# Altium PCB PCB1.PcbDoc (part 1 of 2)
Units mm, origin at the board's own origin, x right, y up, seen from the top; angles counter-clockwise.
Board outline 152.5 x 85 mm, 4 copper layers (Top Layer, GND, PWR/GND, Bottom Layer), stack 1.598 mm thick; 151 components, 100 nets, 477 pads, 653 vias.
Unrouted connection lines stored in the file: 110.
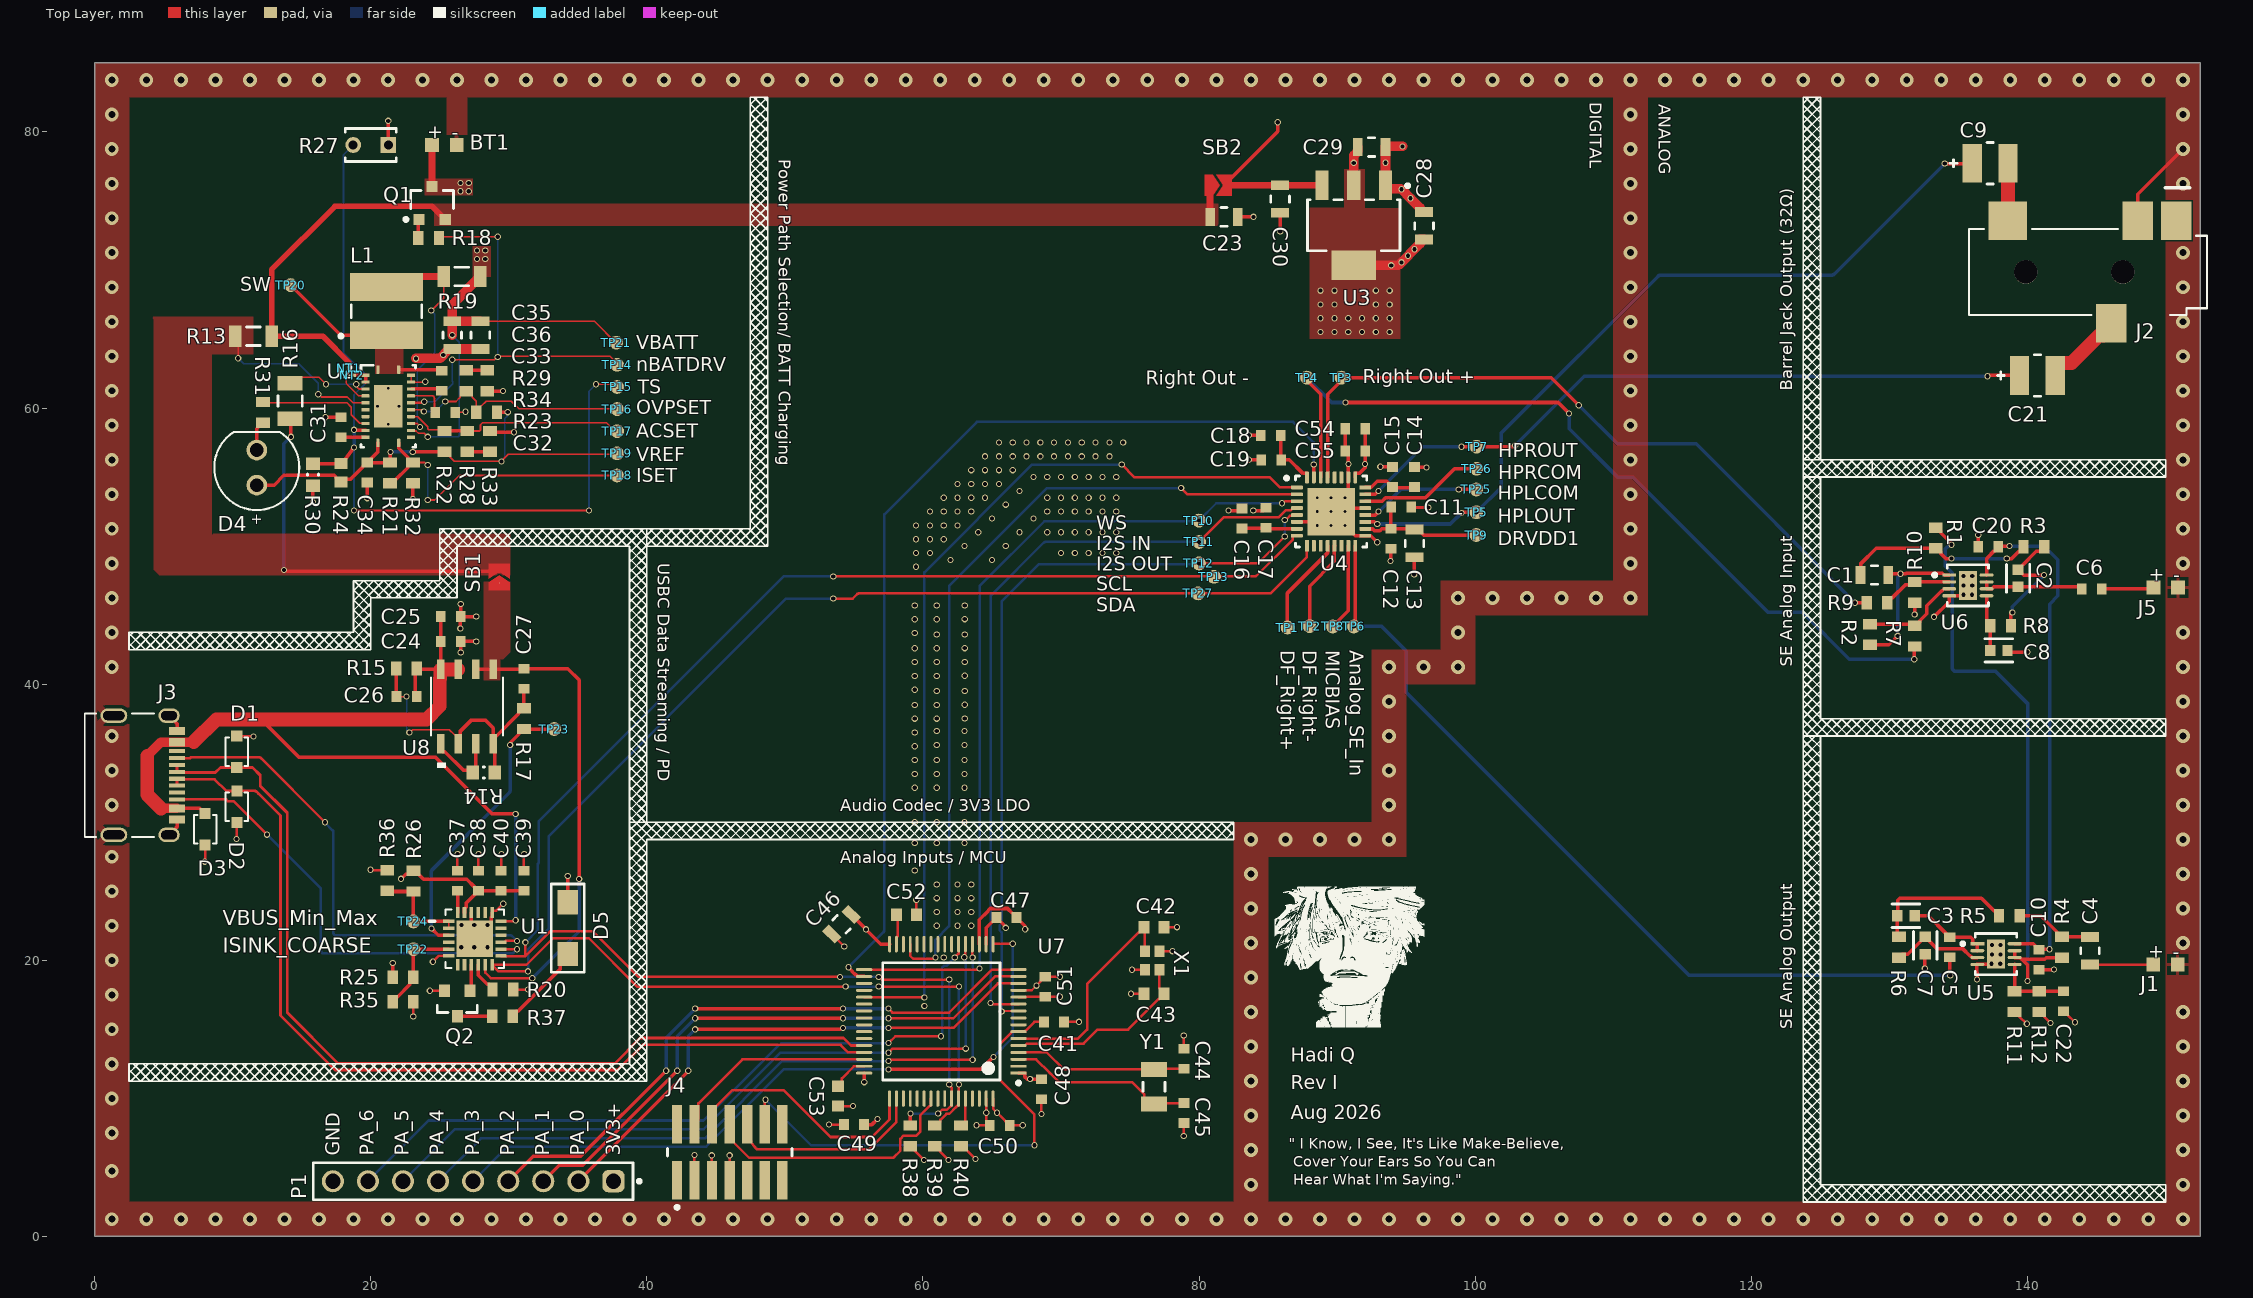
[diagram p0: Top Layer view]
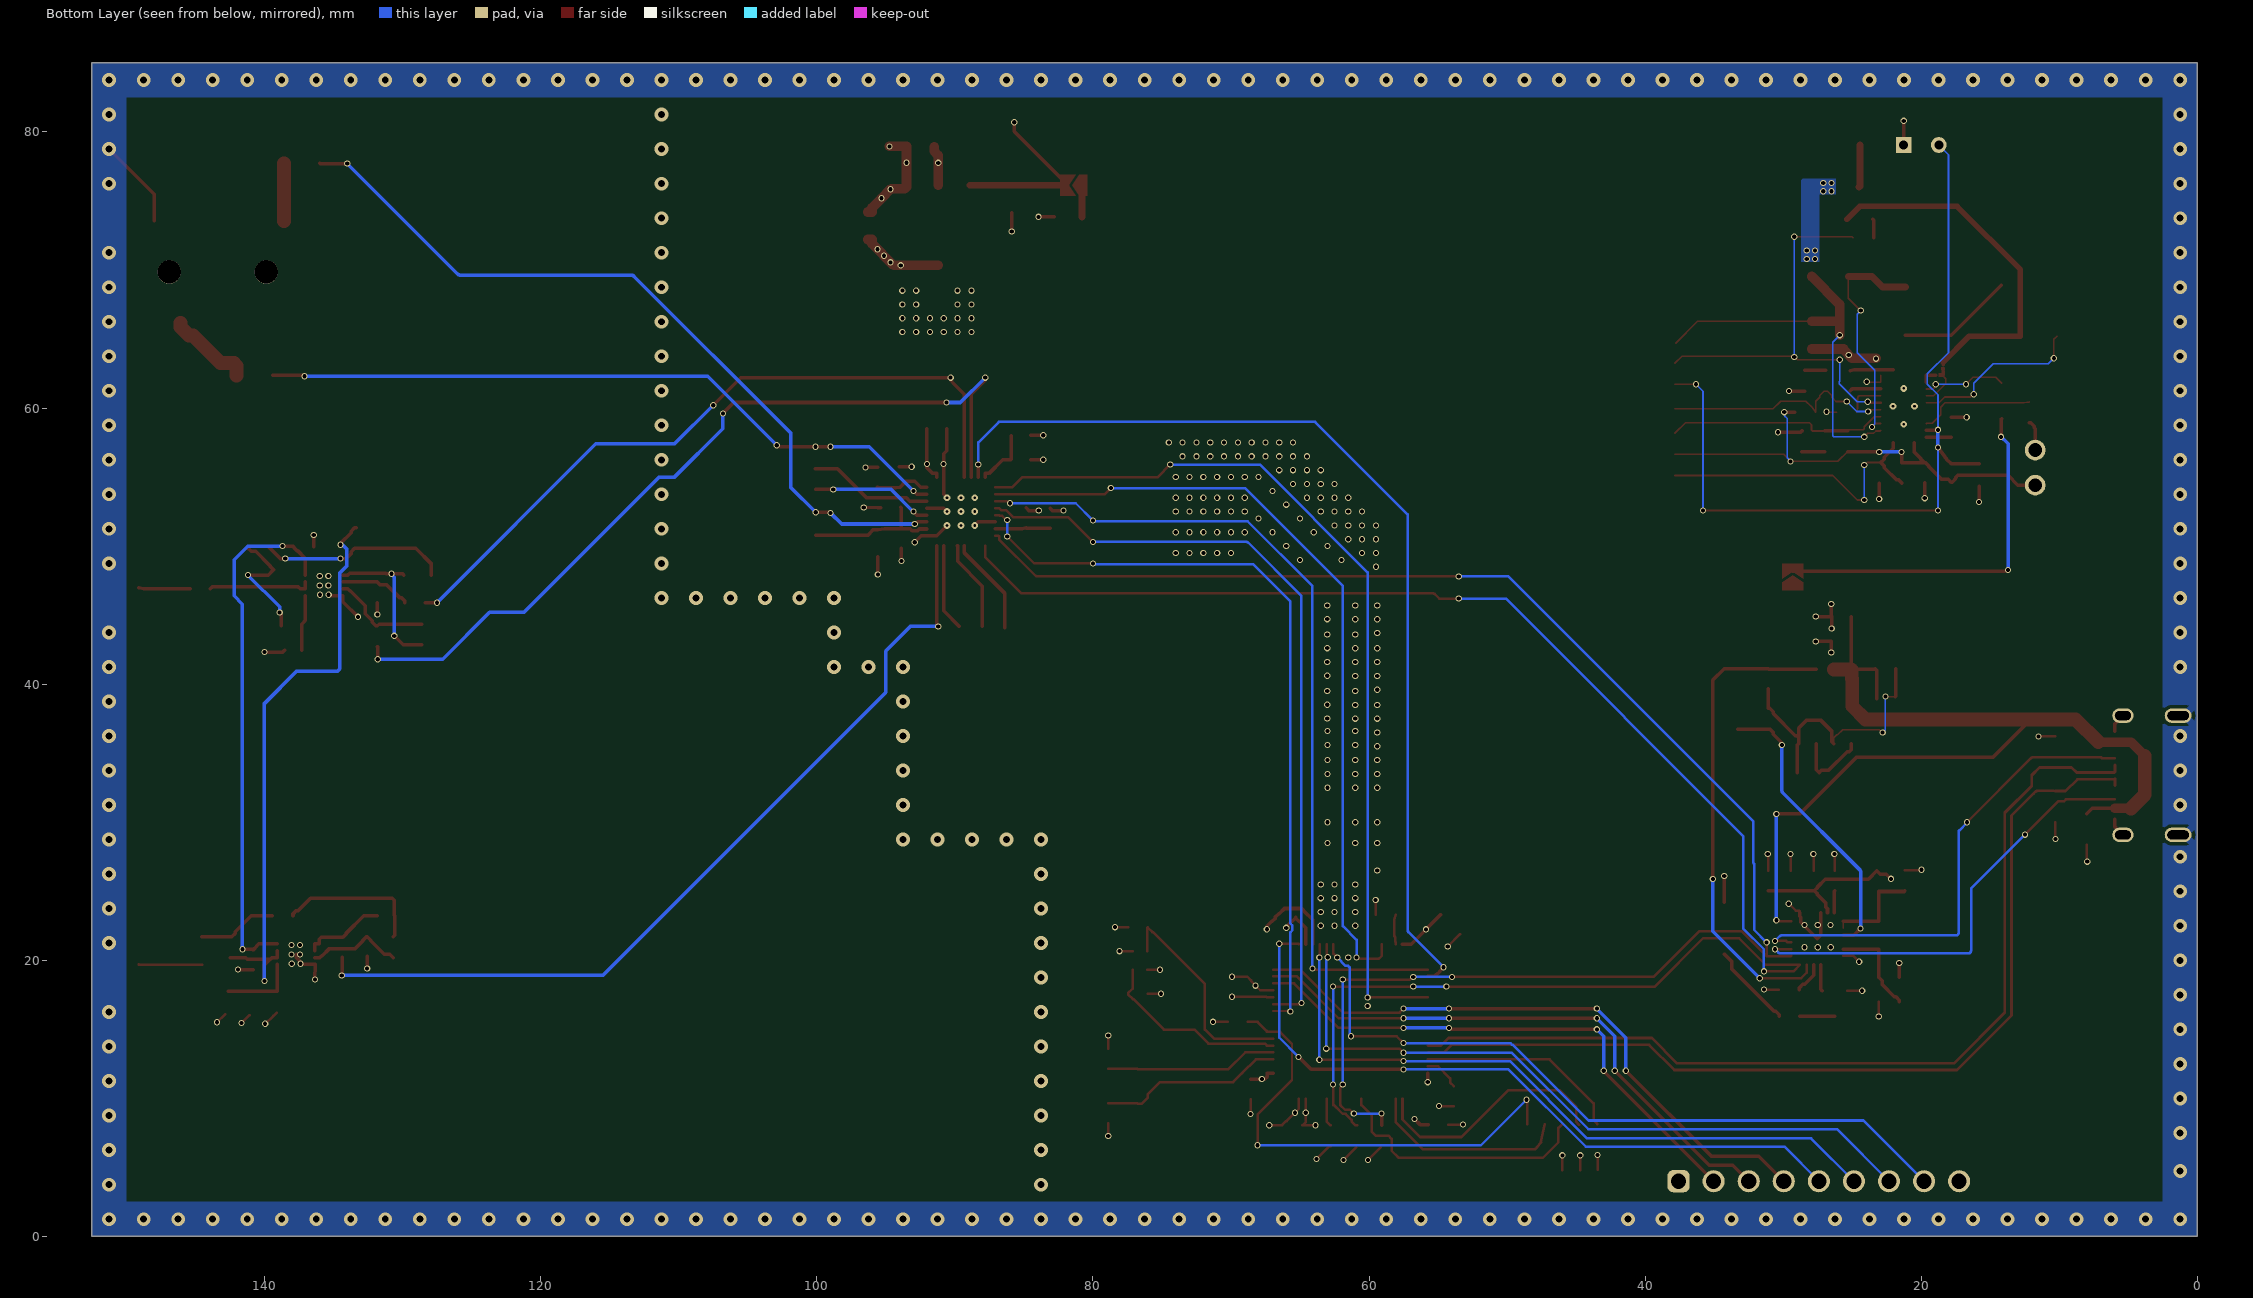
[diagram p1: Bottom Layer view, seen from below]
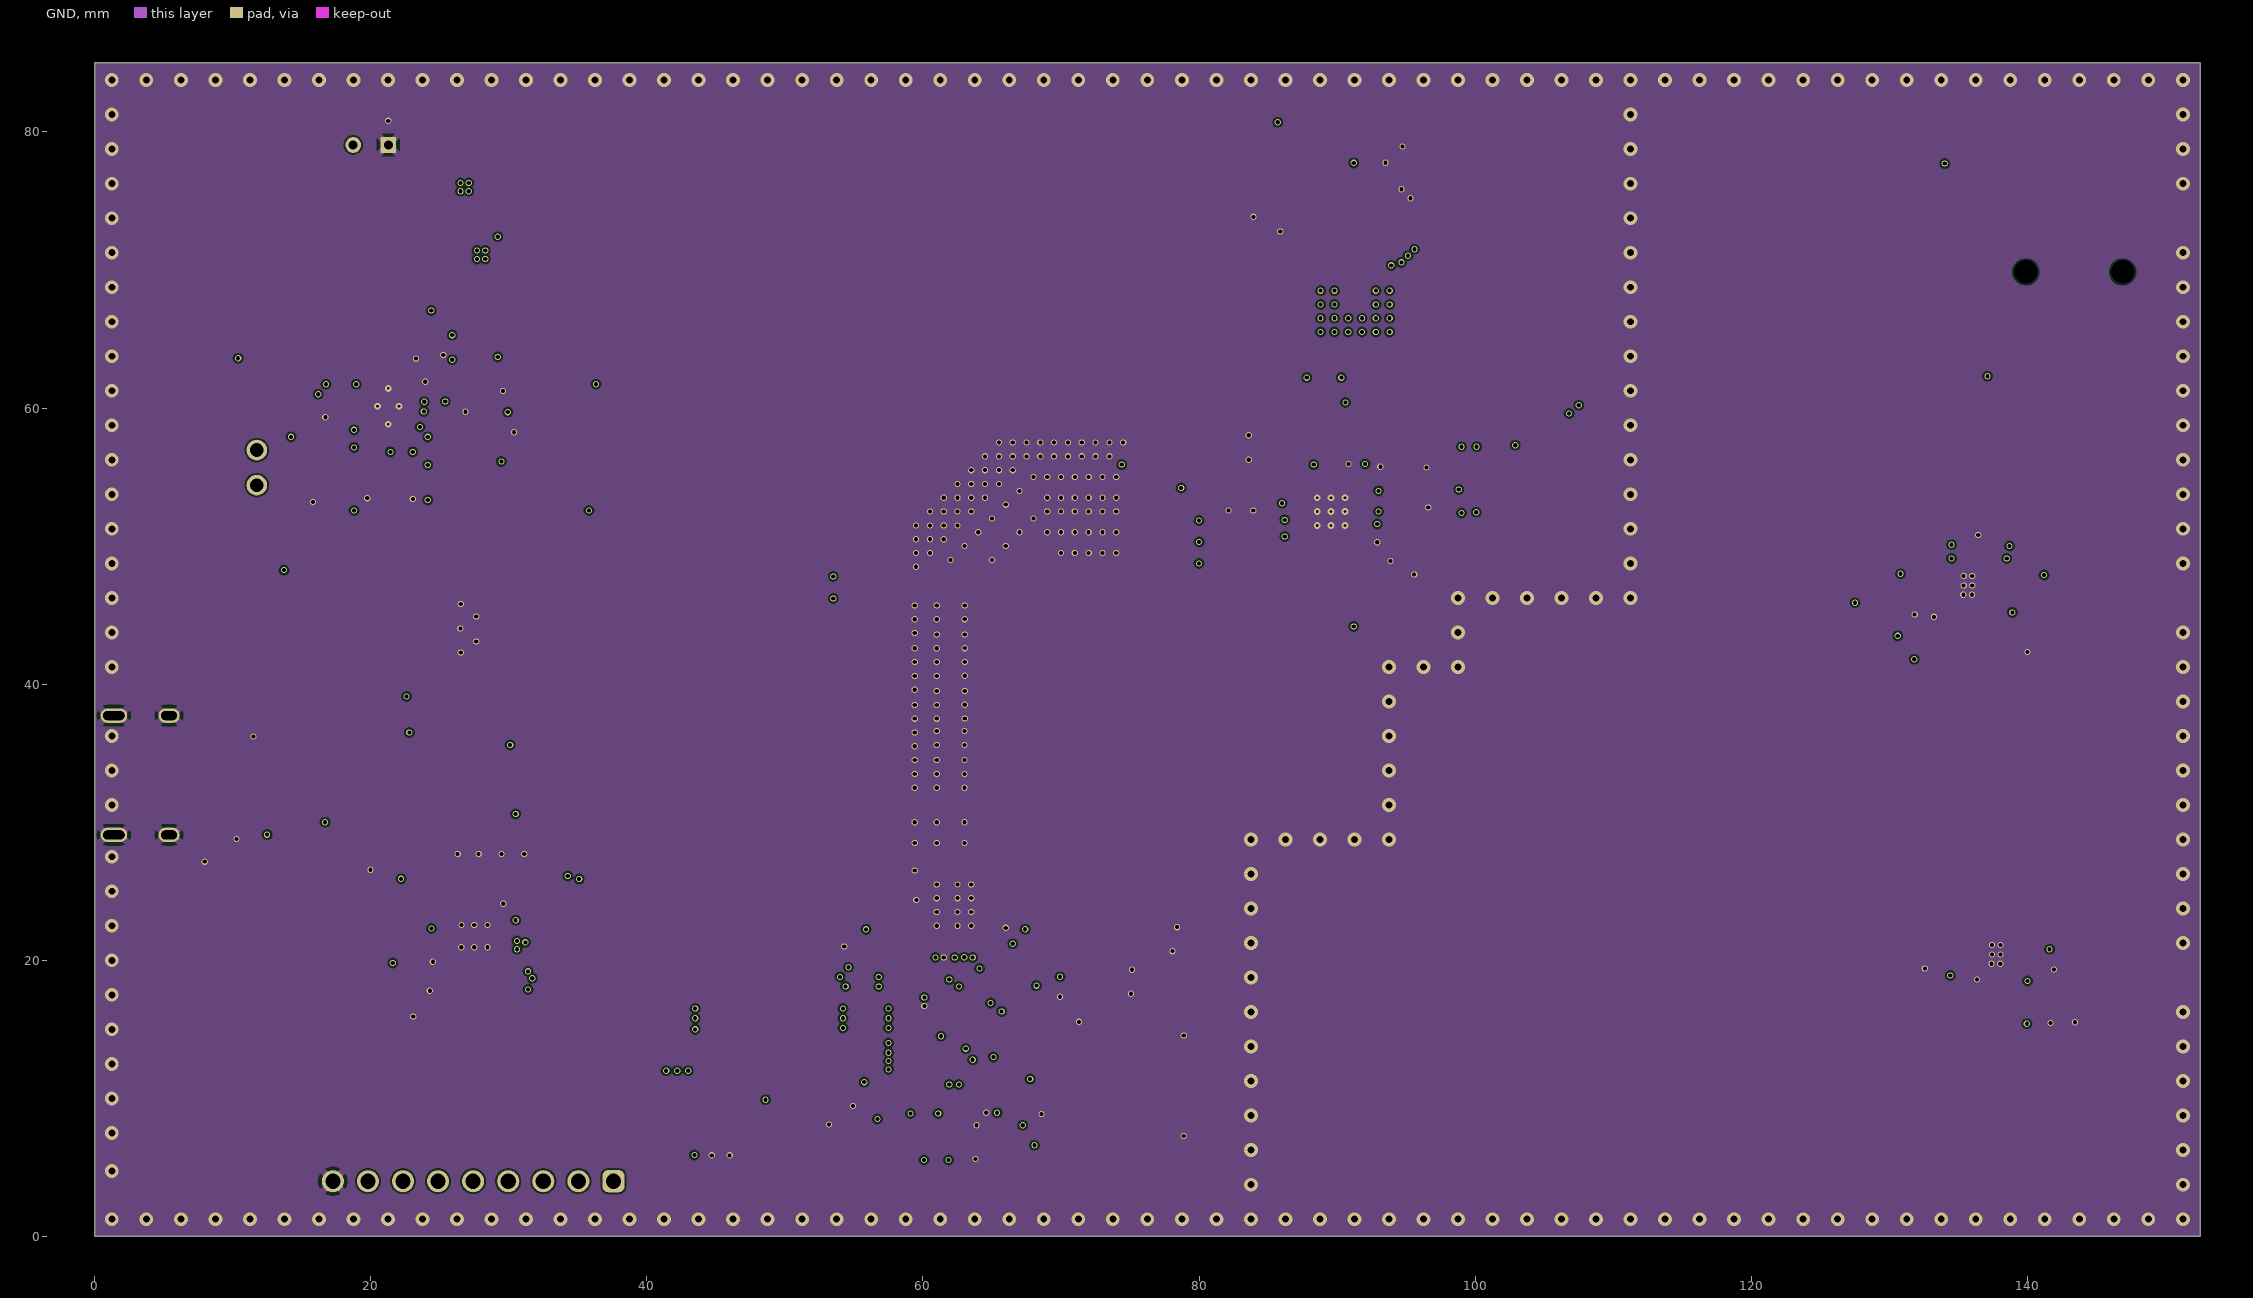
[diagram p2: GND]
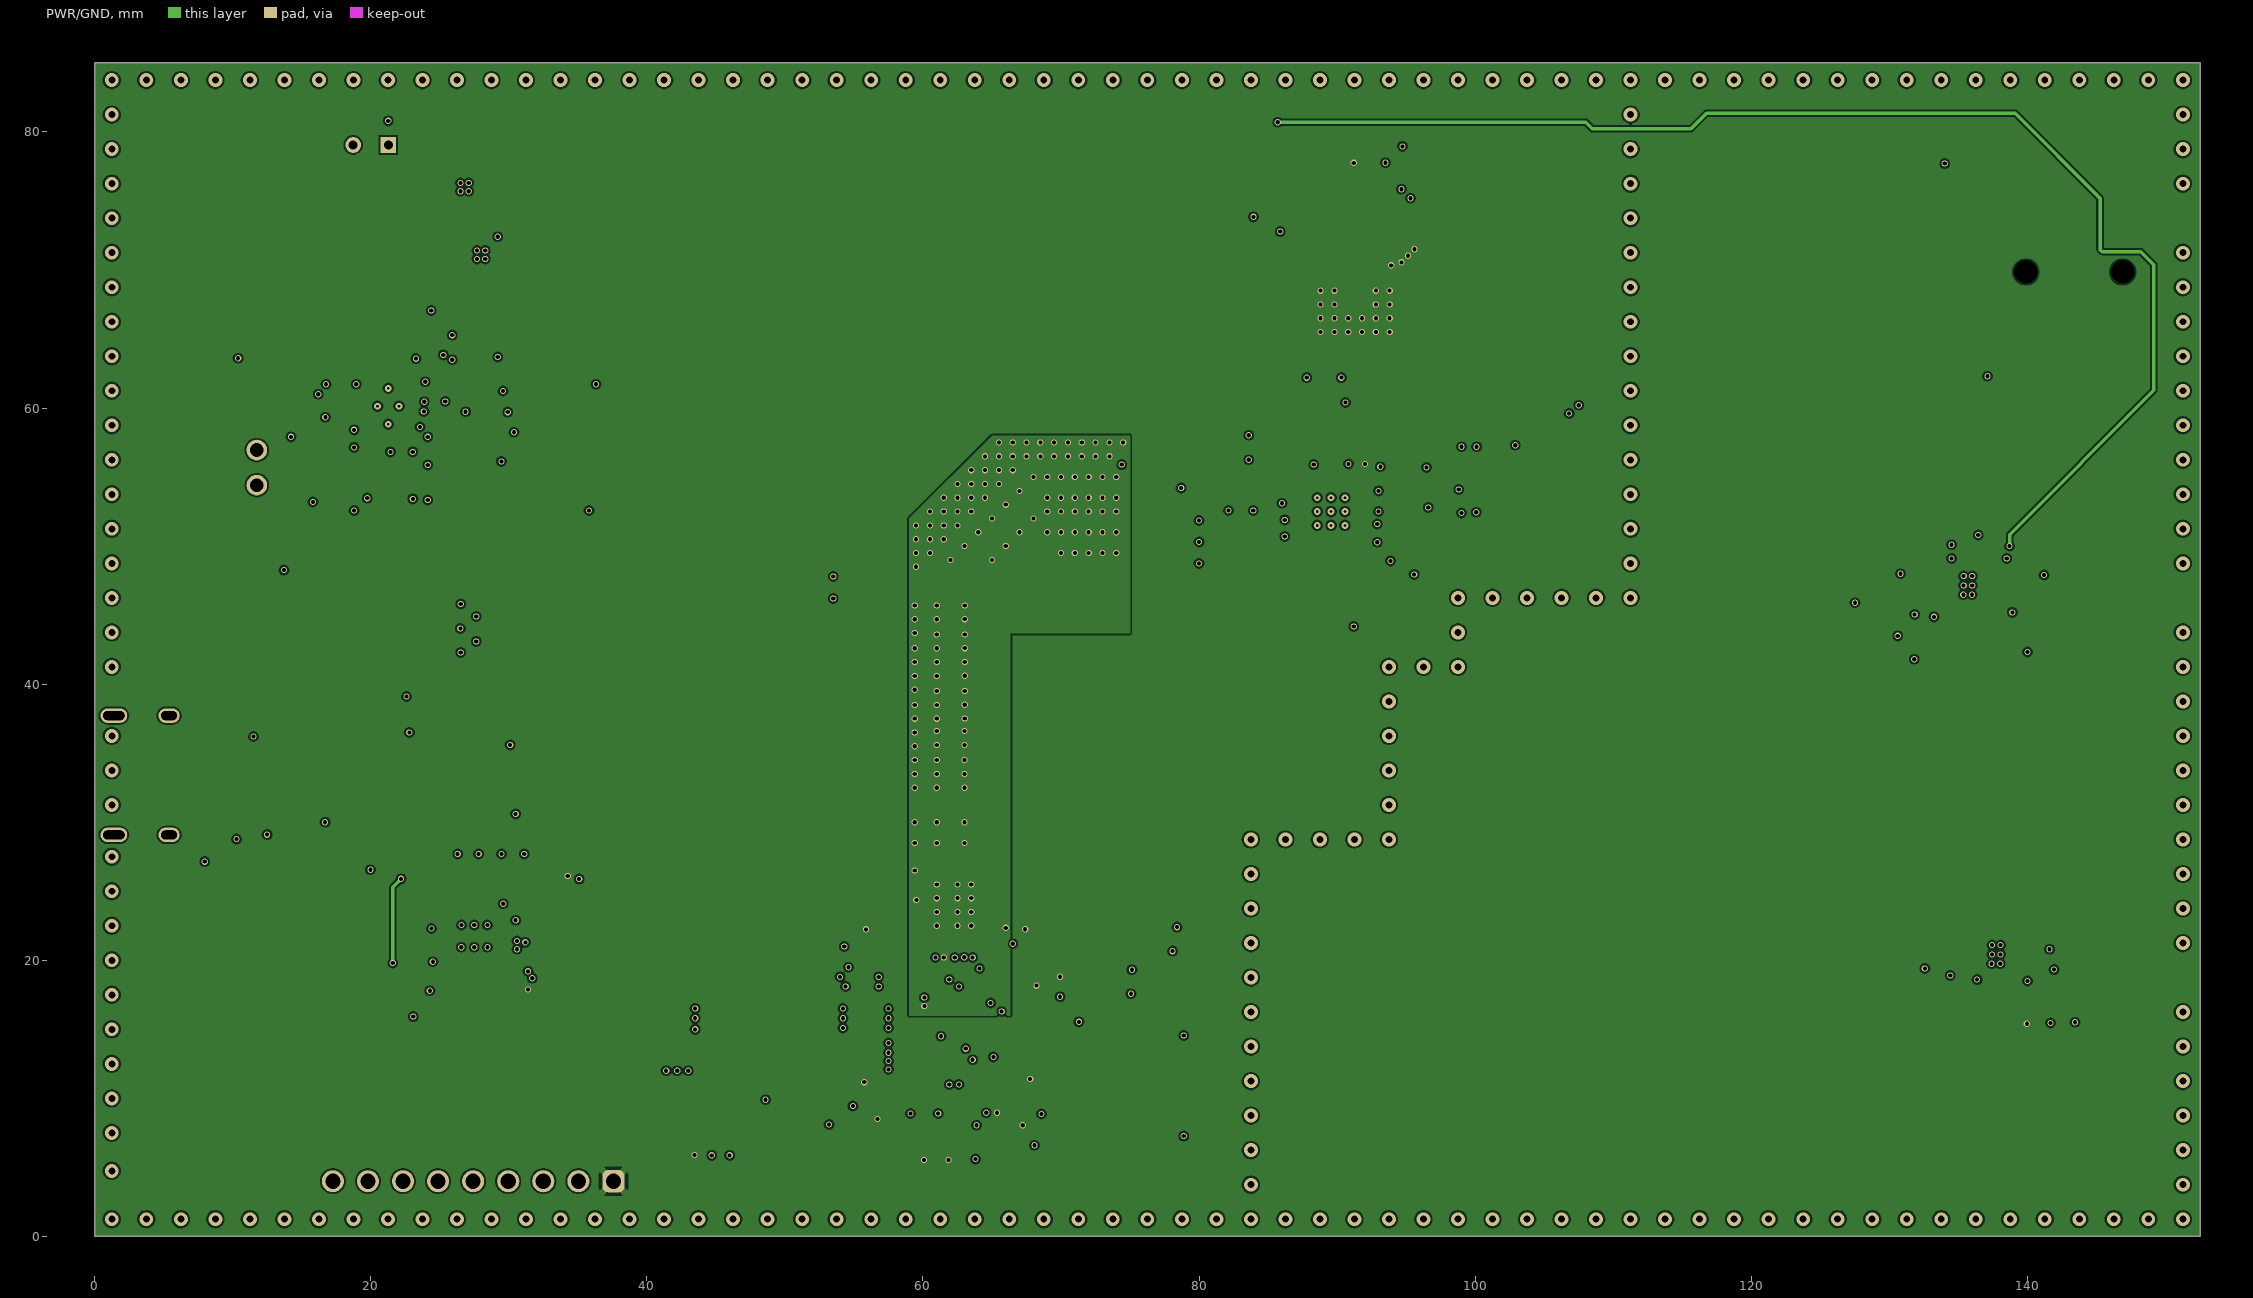
[diagram p3: PWR/GND]
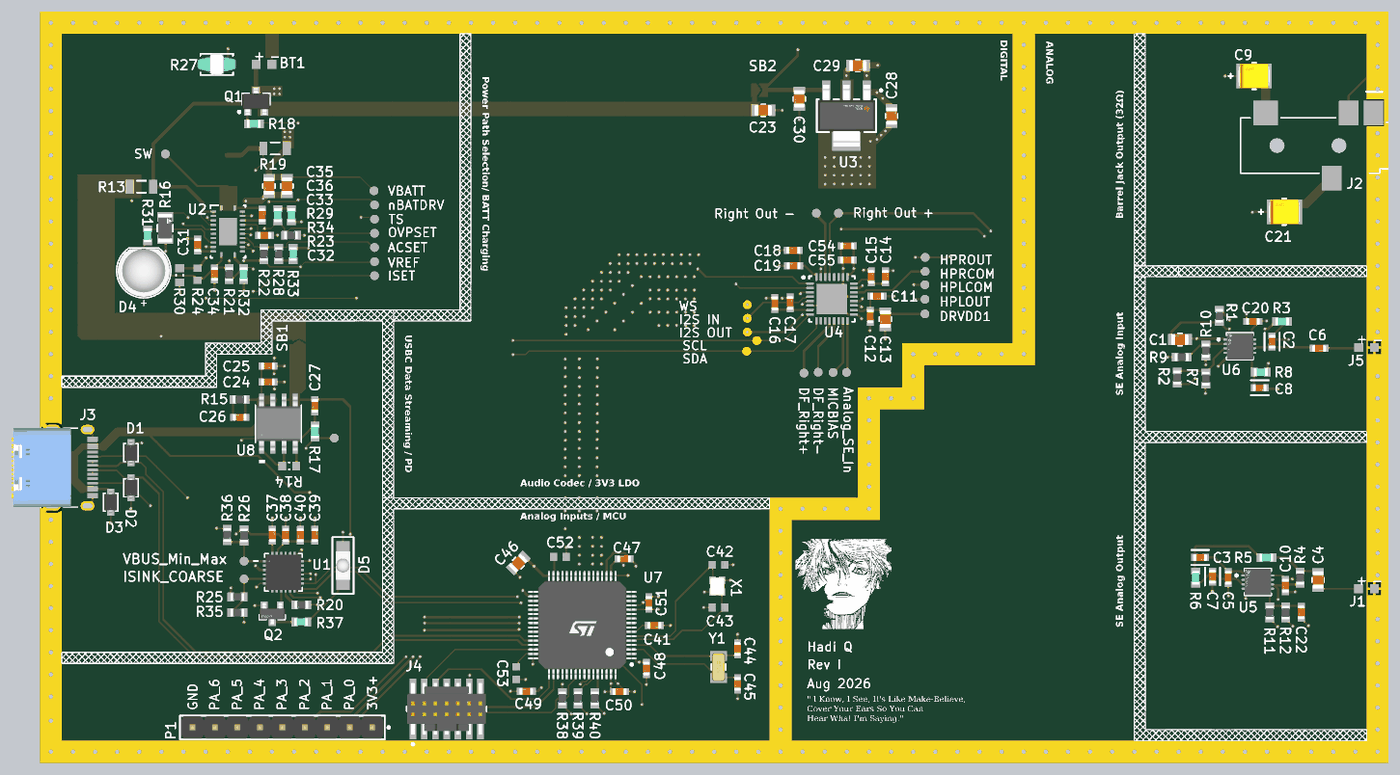
[diagram p5: 3D render of the assembled board from above, using the file's embedded part models]

## Layer stack, top to bottom
Top Solder: solder mask 0.0254, SM-002, Dk 4
Top Layer: signal copper 0.0351
Dielectric 2: prepreg 0.1163, PP-006, Dk 4.1
GND: signal copper 0.0152
Dielectric 1: dielectric 1.2649, FR-4, Dk 4.8
PWR/GND: signal copper 0.0152
Dielectric 3: prepreg 0.1163, PP-006, Dk 4.1
Bottom Layer: signal copper 0.0351
Bottom Solder: solder mask 0.0254, SM-002, Dk 4

## Board outline
0,0 0,85 152.5,85 152.5,0

## Design rules (kind name [scope] priority, off if disabled: settings)
Clearance [All] p1: gap=0.125 ignorepadtopadclearanceinfootprint=TRUE except(0.15: SMDPad-SMDPad SMDPad-THPad SMDPad-Via Via-Fill Via-Poly Via-Region)
DiffPairsRouting [All] p1: maxlimit=1 minlimit=0.127 mostfreqgap=0.292 toplayer_mingap=0.292 toplayer_minwidth=0.2 toplayer_maxwidth=0.2 toplayer_prefwidth=0.2 midlayer1_maxgap=0.127 midlayer1_prefgap=0.127 midlayer1_minwidth=0.117 midlayer1_maxwidth=0.117 midlayer1_prefwidth=0.117 midlayer2_maxgap=0.127 midlayer2_prefgap=0.127 midlayer2_minwidth=0.117 midlayer2_maxwidth=0.117 midlayer2_prefwidth=0.117 bottomlayer_mingap=0.292 bottomlayer_maxgap=0.292 bottomlayer_minwidth=0.2 bottomlayer_maxwidth=0.2 bottomlayer_prefwidth=0.2 impedanceprofiledriven=TRUE impedanceprofileid={DCE49A70-BC4B-4412-AF37-7F07E3D19BCE} impedanceprofilevalue=90.000000 maxuncoupledlength=12.7
Height [All] p1: minheight=0 maxheight=50 prefheight=12.7
HoleSize [All] p1: absolutevalues=TRUE maxlimit=6.3 minlimit=0.15 maxpercent=80.000 minpercent=20.000
HoleToHoleClearance [All] p1: gap=0.22 allowstackedmicrovias=TRUE
MaxMinImpedance [All] p1: minimum=1.000 maximum=10.00
MinimumAnnularRing [All] p1: minimumring=0.07
MinimumSolderMaskSliver [All] p1: minsoldermaskwidth=0.01
PasteMaskExpansion [(InComponent('U7') OR InComponent('U8') OR InComponent('U6') OR InComponent('U5') OR InComponent('U2')  OR InComponent('U4')OR InComponent('U1'))] p1: expansion=0 percent=-30.000000
PasteMaskExpansion PasteMaskExpansion_1 [All] p2: expansion=0 percent=0.000000
PolygonConnect [All] p1: thpad.connectstyle=Relief thpad.reliefconductorwidth=0.508 thpad.reliefentries=4 thpad.polygonreliefangle="45 Angle" thpad.airgapwidth=0.254 smdpad.connectstyle=Direct smdpad.reliefconductorwidth=0.508 smdpad.reliefentries=4 smdpad.polygonreliefangle="45 Angle" smdpad.airgapwidth=0.254 via.connectstyle=Direct via.reliefconductorwidth=0.508 via.reliefentries=4 via.polygonreliefangle="45 Angle" via.airgapwidth=0.254
RoutingVias [All] p1: holewidth=0.3 width=0.45 viastyle="Through Hole" minholewidth=0.3 minwidth=0.4 maxholewidth=0.711 maxwidth=1.27
SilkToSolderMaskClearance [IsPad] p1: minsilkscreentomaskgap=0.01 clearancetoexposedcopper=TRUE
SolderMaskExpansion [All] p1: expansion=0.025 istentingtop=FALSE
SupplyNets "Schematic Supply Nets_2" [InNet('VDDD')] p1: voltage=0.000
SupplyNets "Schematic Supply Nets_8" [InNet('V_Bias')] p2: voltage=0.000
SupplyNets "Schematic Supply Nets_6" [InNet('VCC')] p3: voltage=0.000
SupplyNets "Schematic Supply Nets_5" [InNet('3V3+')] p4: voltage=0.000
SupplyNets "Schematic Supply Nets" [InNet('VREF')] p5: voltage=0.000
SupplyNets "Schematic Supply Nets_1" [InNet('GND')] p6: voltage=0.000
ViasUnderSMD [All] p1: allowed=FALSE
Width Width_50_ohm [InNetClass('50Ω')] p1: maxlimit=0.254 minlimit=0.187 preferedwidth=0.254 toplayer_maxwidth=0.187 toplayer_prefwidth=0.187 bottomlayer_maxwidth=0.187 bottomlayer_prefwidth=0.187 impedanceprofiledriven=TRUE impedanceprofileid={CBE12A36-6EF9-4A58-95A5-F5C6A3B3EB3F} impedanceprofilevalue=50.000000 minimp=50.000000 maximp=50.000000 favimp=50.000000
Width [All] p2: maxlimit=2.5 minlimit=0.12 preferedwidth=0.254
23 further rules are at their usual default settings.

## Classes and differential pairs
net class 50Ω: MCU_I2S_MCLK
differential pair D: +D_P -D_N

## Components (designator, comment, footprint, x,y, rotation, side; value= is the part's Value field where it differs from the comment)
BT1 "2S_BATT" 2_soldering_pads 24.45,79.051 r0 top locked
C1 "GCM21BC71E106KE36L" MURATA-G_M21B 128.905,47.903 r180 top value=10µF
C2 "1nF" FP-GRM188-0_1-e0_2_0_5-IPC_C 139.319,47.665 r270 top
C3 "1nF" FP-GRM188-0_1-e0_2_0_5-IPC_C 131.191,23.232 r0 top
C4 "GCM21BC71E106KE36L" MURATA-G_M21B 144.526,20.692 r90 top value=10µF
C5 "GCM188R71H104KA57D" MURATA-G_M188 134.366,20.946 r270 top value=100nF
C6 "GCM188R71H104KA57D" MURATA-G_M188 144.653,46.903 r0 top value=100nF
C7 "1nF" FP-GRM188-0_1-e0_2_0_5-IPC_C 132.588,21.077 r270 top
C8 "1nF" FP-GRM188-0_1-e0_2_0_5-IPC_C 137.922,42.446 r0 top
C9 "TAJB107M006RNJ" FP-TAJB-MFG 137.287,77.726 r180 top
C10 "GCM188R71H104KA57D" MURATA-G_M188 140.825,20.05 r270 top value=100nF
C11 "GCM188R71H104KA57D" MURATA-G_M188 94.651,52.816 r0 top value=100nF
C12 "GCM188R71E105KA64D" MURATA-G_M188 93.889,50.53 r270 top value=1µF
C13 "GCM21BC71E106KE36L" MURATA-G_M21B 95.6,50.2 r270 top value=10µF
C14 "GCM188R71E105KA64D" MURATA-G_M188 95.6,55 r90 top value=1µF
C15 "GCM188R71H104KA57D" MURATA-G_M188 94,55 r90 top value=100nF
C16 "GCM188R71E105KA64D" MURATA-G_M188 83.1,52 r90 top value=1µF
C17 "GCM188R71H104KA57D" MURATA-G_M188 84.836,52.045 r90 top value=100nF
C18 "GCM188R71E105KA64D" MURATA-G_M188 85.2,58 r180 top value=1µF
C19 "GCM188R71H104KA57D" MURATA-G_M188 85.225,56.25 r180 top value=100nF
C20 "GCM188R71H104KA57D" MURATA-G_M188 137.16,49.951 r180 top value=100nF
C21 "TAJB107M006RNJ" FP-TAJB-MFG 140.716,62.359 r180 top
C22 "GCM188R71E105KA64D" MURATA-G_M188 142.621,17.034 r270 top value=1µF
C23 "GCM21BC71E106KE36L" MURATA-G_M21B 81.803,73.847 r0 top value=10µF
C24 "GCM188R71E105KA64D" MURATA-G_M188 25.794,43.1 r0 top value=1µF
C25 "GCM188R71E105KA64D" MURATA-G_M188 25.794,44.9 r0 top value=1µF
C26 "GCM188R71E105KA64D" MURATA-G_M188 22.6,39.1 r180 top value=1µF
C27 "GCM188R71E105KA64D" MURATA-G_M188 31.1,40.4 r270 top value=1µF
C28 "GCM21BC71E106KE36L" MURATA-G_M21B 96.3,73.2 r90 top value=10µF
C29 "GCM21BC71E106KE36L" MURATA-G_M21B 92.5,78.9 r0 top value=10µF
C30 "GCM21BC71E106KE36L" MURATA-G_M21B 85.867,75.133 r270 top value=10µF
C31 "GCM188R71H104KA57D" MURATA-G_M188 17.846,58.603 r270 top value=100nF
C32 "GCM188R71E105KA64D" MURATA-G_M188 25.4,59.69 r180 top value=1µF
C33 "GCM188R71H104KA57D" MURATA-G_M188 25.146,61.976 r90 top value=100nF
C34 "GCM188R71E105KA64D" MURATA-G_M188 19.751,55.327 r270 top value=1µF
C35 "GCM21BC71E106KE36L" MURATA-G_M21B 27.94,65.278 r270 top value=10µF
C36 "GCM21BC71E106KE36L" MURATA-G_M21B 25.908,65.278 r270 top value=10µF
C37 "GCM188R71E105KA64D" MURATA-G_M188 26.274,25.758 r90 top value=1µF
C38 "GCM188R71E105KA64D" MURATA-G_M188 27.794,25.758 r90 top value=1µF
C39 "GCM188R71H104KA57D" MURATA-G_M188 31.1,25.758 r90 top value=100nF
C40 "GCM188R71H104KA57D" MURATA-G_M188 29.449,25.758 r270 top value=100nF
C41 "GCM188R71H104KA57D" MURATA-G_M188 69.492,15.543 r0 top value=100nF
C42 "CL10C100CB81PNC" FP-CL10-MFG 76.731,22.401 r0 top value=10pF
C43 "CL10C100CB81PNC" FP-CL10-MFG 76.731,17.575 r180 top value=10pF
C44 "GCM1885C2A3R3CA16D" MURATA-G_M188 78.89,12.876 r90 top value=3.3pF
C45 "GCM1885C2A3R3CA16D" MURATA-G_M188 78.89,8.939 r270 top value=3.3pF
C46 "GCM21BC71E106KE36L" MURATA-G_M21B 54.102,22.606 r225 top value=10µF
C47 "GCM188R71H104KA57D" MURATA-G_M188 66.05,23.1 r180 top value=100nF
C48 "GCM188R71H104KA57D" MURATA-G_M188 68.58,10.668 r270 top value=100nF
C49 "GCM188R71H104KA57D" MURATA-G_M188 55,8.1 r180 top value=100nF
C50 "GCM188R71H104KA57D" MURATA-G_M188 65.555,8.05 r180 top value=100nF
C51 "GCM188R71H104KA57D" MURATA-G_M188 68.857,18.083 r270 top value=100nF
C52 "CL10A225KA8NNNC" FP-CL10-MFG 58.8,23.3 r0 top value=2.2µF
C53 "CL10A225KA8NNNC" FP-CL10-MFG 53.848,10.16 r270 top value=2.2µF
C54 "GCM188R71E105KA64D" MURATA-G_M188 91.3,58.5 r180 top value=1µF
C55 "GCM188R71H104KA57D" MURATA-G_M188 91.3,56.9 r180 top value=100nF
D1 "SD12C.TCT" SDXXC.TCT 10.298,35.1 r270 top
D2 "SD12C.TCT" SDXXC.TCT 10.308,31.124 r90 top
D3 "SD12C.TCT" SDXXC.TCT 8.011,29.492 r90 top
D4 "151051RS11000" WL-TMRC_D5.9H8.7 11.75,55.683 r90 top
D5 "APTD3216SURCK" APTD3216SURCK-Footprint-1 34.275,22.329 r270 top
J1 "Solder_Pads" 2_soldering_pads 149.1,19.7 r0 top
J2 "SJ-43514-SMT-TR" SJ-43514-SMT_CUD 143.637,69.852 r270 top
J3 "10171746-00021LF" AMPHENOL_10171746-00021LF 1.397,33.401 r270 top
J4 "FTSH-107-01-F-DV-K" FP-FTSH-107-01-F-DV-K-MFG 46,6.1 r0 top
J5 "Solder_Pads" 2_soldering_pads 149.122,47 r0 top
L1 "74408941078" WE-SPC_4818 -1248.852,-1202.986 r180 top
NT1 "Net_Tie" Net_TIe_254 18.425,62.7 r90 top net-tie
NT2 "Net_Tie" Net_TIe_254 18.8,62.375 r180 top net-tie
P1 "61300911121" 61300911121 27.42,4 r180 top
Q1 "AO3401A" AO-SOT-23-3L_V 24.45,74.86 r90 top
Q2 "2N7002-7-F" DIODESINC-SOT23 26.274,16.868 r270 top
R1 "CRCW060310K0FKTA" VISHAY-CRCW0603 133.35,50.586 r90 top value=10k
R2 "CRCW060310K0FKTA" VISHAY-CRCW0603 128.6,43.6 r90 top value=10k
R3 "TNPW06031K00BEEA" VISHAY-TNPW0603 140.462,49.951 r180 top value=1k
R4 "CRCW060310K0FKTA" VISHAY-CRCW0603 142.494,20.946 r270 top value=10k
R5 "TNPW06031K00BEEA" VISHAY-TNPW0603 138.684,23.232 r0 top value=1k
R6 "TNPW06031K00BEEA" VISHAY-TNPW0603 130.683,20.946 r90 top value=1k
R7 "CRCW060310K0FKTA" VISHAY-CRCW0603 131.826,43.474 r270 top value=10k
R8 "TNPW06031K00BEEA" VISHAY-TNPW0603 138.049,44.224 r0 top value=1k
R9 "CRCW060310K0FKTA" VISHAY-CRCW0603 129.1,45.9 r180 top value=10k
R10 "CRCW060310K0FKTA" VISHAY-CRCW0603 131.826,46.649 r270 top value=10k
R11 "CRCW060310K0FKTA" VISHAY-CRCW0603 139.065,17.009 r270 top value=10k
R12 "CRCW060310K0FKTA" VISHAY-CRCW0603 140.843,17.009 r90 top value=10k
R13 "0.020" RESC3216X70X50LL05T20 11.5,65.2 r0 top
R14 "30.1k" RESC0603(1608)_N 28.2,33.6 r180 top value="30100.00 Ohm"
R15 "CRCW060310K0FKTA" VISHAY-CRCW0603 22.596,41.125 r0 top value=10k
R16 "CRCW120610R0FKEAHP" FP-CRCW1206-e3-MFG 14.163,60.509 r90 top value=10
R17 "TNPW06031K00BEEA" VISHAY-TNPW0603 31.1,37.5 r90 top value=1k
R18 "TNPW06031K00BEEA" VISHAY-TNPW0603 24.196,72.32 r0 top value=1k
R19 "0.020" RESC3216X70X50LL05T20 26.609,69.526 r0 top
R20 "CRCW06034K70FKTA" VISHAY-CRCW0603 29.576,17.884 r180 top value=4.7k
R21 "CRCW060310K0FKTA" VISHAY-CRCW0603 21.402,55.302 r90 top value=10k
R22 "CRCW060310K0FKTA" VISHAY-CRCW0603 25.339,57.588 r270 top value=10k
R23 "CRCW060310K0FKTA" VISHAY-CRCW0603 28.4,59.7 r0 top value=10k
R24 "5.23k" RESC1608X55X30NL15T15 17.846,55.302 r270 top
R25 "CRCW060310K0FKTA" VISHAY-CRCW0603 22.337,18.773 r180 top value=10k
R26 "CRCW060310K0FKTA" VISHAY-CRCW0603 23.099,25.733 r90 top value=10k
R27 "103AT-2" FP-103AT-2-MFG 20.005,79.051 r180 top
R28 "CRCW06032K20FKTA" VISHAY-CRCW0603 26.99,57.588 r90 top value=2.2k
R29 "TNPW06031K00BEEA" VISHAY-TNPW0603 26.924,61.976 r270 top value=1k
R30 "30.1k" RESC0603(1608)_N 15.814,55.175 r90 top value="30100.00 Ohm"
R31 "TNPW06031K00BEEA" VISHAY-TNPW0603 12.192,59.69 r270 top value=1k
R32 "TNPW06031K00BEEA" VISHAY-TNPW0603 23.053,55.302 r90 top value=1k
R33 "TNPW06031K00BEEA" VISHAY-TNPW0603 28.641,57.588 r270 top value=1k
R34 "TNPW06031K00BEEA" VISHAY-TNPW0603 28.448,61.976 r90 top value=1k
R35 "CRCW06034K70FKTA" VISHAY-CRCW0603 22.337,16.995 r0 top value=4.7k
R36 "CRCW06032K20FKTA" VISHAY-CRCW0603 21.194,25.783 r270 top value=2.2k
R37 "TNPW06031K00BEEA" VISHAY-TNPW0603 29.544,15.941 r0 top value=1k
R38 "CRCW060310K0FKTA" VISHAY-CRCW0603 59.078,7.288 r270 top value=10k
R39 "CRCW060310K0FKTA" VISHAY-CRCW0603 60.856,7.288 r270 top value=10k
R40 "CRCW060310K0FKTA" VISHAY-CRCW0603 62.761,7.288 r270 top value=10k
SB1 "SOLDER_BRIDGE" SOLDER_BRIDGE_60MIL 29.307,47.75 r90 top net-tie
SB2 "SOLDER_BRIDGE" SOLDER_BRIDGE_60MIL 81.384,76.133 r0 top net-tie
TP1 "Testpoint 1mm" "Testpoint 1mm"#1 86.4,44.1 r90 top
TP2 "Testpoint 1mm" "Testpoint 1mm"#1 88,44.2 r90 top
TP3 "Testpoint 1mm" "Testpoint 1mm"#1 90.3,62.2 r90 top
TP4 "Testpoint 1mm" "Testpoint 1mm"#1 87.8,62.2 r90 top
TP5 "Testpoint 1mm" "Testpoint 1mm"#1 100.076,52.451 r90 top
TP6 "Testpoint 1mm" "Testpoint 1mm"#1 91.205,44.18 r90 top
TP7 "Testpoint 1mm" "Testpoint 1mm"#1 100.1,57.2 r90 top
TP8 "Testpoint 1mm" "Testpoint 1mm"#1 89.681,44.18 r90 top
TP9 "Testpoint 1mm" "Testpoint 1mm"#1 100.076,50.8 r90 top
TP10 "Testpoint 1mm" "Testpoint 1mm"#2 79.99,51.846 r90 top
TP11 "Testpoint 1mm" "Testpoint 1mm"#2 80,50.3 r90 top
TP12 "Testpoint 1mm" "Testpoint 1mm"#2 79.99,48.746 r90 top
TP13 "Testpoint 1mm" "Testpoint 1mm"#2 81.075,47.775 r90 top
TP14 "Testpoint 1mm" "Testpoint 1mm"#1 37.846,63.127 r0 top
TP15 "Testpoint 1mm" "Testpoint 1mm"#1 37.846,61.526 r0 top
TP16 "Testpoint 1mm" "Testpoint 1mm"#1 37.846,59.924 r0 top
TP17 "Testpoint 1mm" "Testpoint 1mm"#1 37.846,58.322 r0 top
TP18 "Testpoint 1mm" "Testpoint 1mm"#1 37.846,55.118 r0 top
TP19 "Testpoint 1mm" "Testpoint 1mm"#1 37.846,56.72 r0 top
TP20 "Testpoint 1mm" "Testpoint 1mm"#1 14.2,68.9 r0 top
TP21 "Testpoint 1mm" "Testpoint 1mm"#1 37.785,64.729 r0 top
TP22 "Testpoint 1mm" "Testpoint 1mm"#1 23.099,20.805 r90 top
TP23 "Testpoint 1mm" "Testpoint 1mm"#1 33.3,36.75 r180 top
TP24 "Testpoint 1mm" "Testpoint 1mm"#1 23.099,22.817 r90 top
TP25 "Testpoint 1mm" "Testpoint 1mm"#1 100.076,54.102 r90 top
TP26 "Testpoint 1mm" "Testpoint 1mm"#1 100.1,55.6 r90 top
TP27 "Testpoint 1mm" "Testpoint 1mm"#2 79.925,46.575 r90 top
U1 "CYPD3177-24LQXQT" QFN24_CYPD3177-24LQXQT_INF 27.544,21.567 r0 top
U2 "BQ24133RGYT" RGY0024A_V 21.275,60.128 r0 top
U3 "TLV1117-33IDCYR" FP-DCY0004A-MFG 91.201,73.233 r270 top
U4 "TLV320AIC3104IRHBT" RHB0032E_V 89.558,52.5 r0 top
U5 "OPA1678IDRGR" FP-DRG0008A-IPC_B 137.714,20.45 r0 top
U6 "OPA1678IDRGR" FP-DRG0008A-IPC_B 135.682,47.153 r0 top
U7 "STM32F405RGT6TR" FP-LQFP64-5W-IPC_C 61.329,15.578 r180 top
U8 "DMP3098LSD-13" SOP_DMP3098LSD-13_DIO 26.974,38.377 r90 top
X1 "ECS-250-10-37BQ-CTN-TR" ECX-1637BQ-ECS 76.604,19.988 r270 top
Y1 "ECS-.327-7-34QCS-TR" ECX-34Q-ECS 76.731,10.844 r270 top

## Footprints (in the part's own frame and the unit in brackets; to place one, negate y for a bottom-side part, rotate by r counter-clockwise, add the part's x,y. Pads: shape width x height; smd on the part's side, far side on the other; paste and mask are expansions set on the pad)
2_soldering_pads [mm]
  rect 1x1 smd mask+0: 1(0,0) 2(1.778,0)
61300911121 [mm] "Pin Header, pitch 2.54 mm, THT, Vertical, single row, 9p"
  rrect50% 1.6x1.6 hole 1.1: 1(-10.16,0)
  round 1.6 hole 1.1: 2(-7.62,0) 3(-5.08,0) 4(-2.54,0) 5(0,0) 6(2.54,0) 7(5.08,0) 8(7.62,0) 9(10.16,0)
  silkscreen extent -12.15,-1.35 11.58,1.35, body extent -11.43,-1.27 11.43,1.27, height 8.57
AMPHENOL_10171746-00021LF [mm]
  rect 0.6x1.15 smd: A1_B12(-3.2,4.575) A4_B9(-2.4,4.575) B1_A12(3.2,4.575) B4_A9(2.4,4.575)
  rect 0.3x1.15 smd: A5(-1.25,4.575) A6(-0.25,4.575) A7(0.25,4.575) A8(1.25,4.575) B5(1.75,4.575) B6(0.75,4.575) B7(-0.75,4.575) B8(-1.75,4.575)
  oval 1.05x1.55 hole 0.65 slot 1.15 at 90 deg: SH1(-4.32,4) SH2(4.32,4)
  oval 1.05x1.95 hole 0.65 slot 1.55 at 90 deg: SH3(-4.32,0) SH4(4.32,0)
  silkscreen extent -4.47,-2.1 4.47,2.91, body extent -4.47,-2.1 4.47,4.65, height 3.26
AO-SOT-23-3L_V [mm] "SOT23, 3-Leads, Body 3.1x1.8mm, Pitch 0.95mm"
  rect 0.8x0.8 smd: 1(-1.2,0.95) 2(-1.2,-0.95) 3(1.2,0)
  silkscreen extent -1.32,-1.55 0.9,2.02, body extent -1.5,-1.55 1.5,1.55, height 1.25
APTD3216SURCK-Footprint-1 [mm]
  rect 1.75x1.5 smd: 1(1.875,0) 2(-1.875,0)
  silkscreen extent -3.2,-1.2 3.2,1.2, body extent -1.6,-0.8 1.6,0.8, height 1.81
DIODESINC-SOT23 [mm]
  rect 0.9x0.8 smd: 1(-0.927,0.915) 2(-0.927,-0.915) 3(0.927,0)
  silkscreen extent 0.13,-1.45 0.65,1.45, body extent -1.86,-1.7 1.86,1.7, height 0.25
ECX-34Q-ECS [mm]
  rect 1.1x1.9 smd: 1(-1.25,0) 2(1.25,0)
  silkscreen extent -0.33,-0.8 0.33,0.8, body extent -1.9,-1.05 1.9,1.05, height 0.25
ECX-1637BQ-ECS [mm]
  rect 0.85x0.75 smd: 1(-0.675,-0.525) 2(0.675,-0.525) 3(0.675,0.525) 4(-0.675,0.525)
  body extent -1,-0.8 1,0.8, height 0.5
FP-103AT-2-MFG [mm]
  rect 1.15x1.15 hole 0.65 mask+0: 1(-1.27,0)
  round 1.15 hole 0.65 mask+0: 2(1.27,0)
  silkscreen extent -1.85,-1.2 1.85,1.2, body extent -1.95,-1.3 1.95,1.3, height 0.25
FP-CL10-MFG [mm]
  rect 0.81x0.9 smd: 1(-0.72,0) 2(0.72,0)
  body extent -1.46,-0.71 1.46,0.71, height 0.25
FP-CRCW1206-e3-MFG [mm]
  rect 1.05x1.8 smd: 1(-1.275,0) 2(1.275,0)
  silkscreen extent -0.38,-0.87 0.38,0.87, body extent -1.9,-1 1.9,1, height 0.25
FP-DCY0004A-MFG [mm]
  rect 2.15x0.95 smd mask+0: 1(-2.9,2.3) 2(-2.9,0) 3(-2.9,-2.3)
  rect 2.15x3.25 smd mask+0: 4(2.9,0)
  silkscreen extent -2.99,-3.35 1.85,4.02, body extent -4.08,-3.45 4.08,3.45, height 0.25
FP-DRG0008A-IPC_B [mm]
  rect 1.01x0.242 smd mask+0: 1(-1.351,0.75)
  rrect100% 1.01x0.242 smd mask+0: 2(-1.351,0.25) 3(-1.351,-0.25) 4(-1.351,-0.75) 5(1.351,-0.75) 6(1.351,-0.25) 7(1.351,0.25) 8(1.351,0.75)
  rect 1.3x2.1 smd mask+0: 9(0,0)
  silkscreen extent -2.53,-1.5 1.5,1.5, body extent -2.11,-1.75 2.11,1.75, height 0.25
FP-FTSH-107-01-F-DV-K-MFG [mm]
  rect 0.74x2.79 smd: 1(-3.81,-2.035) 2(-3.81,2.035) 3(-2.54,-2.035) 4(-2.54,2.035) 5(-1.27,-2.035) 6(-1.27,2.035) 7(0,-2.035) 8(0,2.035) 9(1.27,-2.035) 10(1.27,2.035) 11(2.54,-2.035) 12(2.54,2.035) 13(3.81,-2.035) 14(3.81,2.035)
  silkscreen extent -4.51,-4.11 4.51,0.27, body extent -4.61,-3.53 4.61,3.53, height 0.25
FP-GRM188-0_1-e0_2_0_5-IPC_C [mm]
  rect 0.759x0.812 smd mask+0: 1(-0.627,0) 2(0.627,0)
  silkscreen extent -1.01,-0.85 1.01,0.85, body extent -1.11,-0.55 1.11,0.55, height 0.25
FP-LQFP64-5W-IPC_C [mm]
  rect 1.188x0.212 smd mask+0: 1(-5.591,3.75)
  rrect100% 1.188x0.212 smd mask+0: 2(-5.591,3.25) 3(-5.591,2.75) 4(-5.591,2.25) 5(-5.591,1.75) 6(-5.591,1.25) 7(-5.591,0.75) 8(-5.591,0.25) 9(-5.591,-0.25) 10(-5.591,-0.75) 11(-5.591,-1.25) 12(-5.591,-1.75) 13(-5.591,-2.25) 14(-5.591,-2.75) 15(-5.591,-3.25) 16(-5.591,-3.75) 33(5.591,-3.75) 34(5.591,-3.25) 35(5.591,-2.75) 36(5.591,-2.25) 37(5.591,-1.75) 38(5.591,-1.25) 39(5.591,-0.75) 40(5.591,-0.25) 41(5.591,0.25) 42(5.591,0.75) 43(5.591,1.25) 44(5.591,1.75) 45(5.591,2.25) 46(5.591,2.75) 47(5.591,3.25) 48(5.591,3.75)
  rrect100% 0.212x1.188 smd mask+0: 17(-3.75,-5.591) 18(-3.25,-5.591) 19(-2.75,-5.591) 20(-2.25,-5.591) 21(-1.75,-5.591) 22(-1.25,-5.591) 23(-0.75,-5.591) 24(-0.25,-5.591) 25(0.25,-5.591) 26(0.75,-5.591) 27(1.25,-5.591) 28(1.75,-5.591) 29(2.25,-5.591) 30(2.75,-5.591) 31(3.25,-5.591) 32(3.75,-5.591) 49(3.75,5.591) 50(3.25,5.591) 51(2.75,5.591) 52(2.25,5.591) 53(1.75,5.591) 54(1.25,5.591) 55(0.75,5.591) 56(0.25,5.591) 57(-0.25,5.591) 58(-0.75,5.591) 59(-1.25,5.591) 60(-1.75,5.591) 61(-2.25,5.591) 62(-2.75,5.591) 63(-3.25,5.591) 64(-3.75,5.591)
  silkscreen extent -5.72,-4.25 4.25,4.58, body extent -6.29,-6.29 6.29,6.29, height 0.25
FP-TAJB-MFG [mm]
  rect 1.4x2.8 smd mask+0: 1(-1.3,0) 2(1.3,0)
  silkscreen extent -0.23,-1.5 2.9,1.5, body extent -2.1,-1.6 2.1,1.6, height 0.25
MURATA-G_M21B [mm]
  rect 0.7x1.3 smd: 1(-1,0) 2(1,0)
  silkscreen extent -0.23,-0.67 0.23,0.67, body extent -1.4,-0.82 1.4,0.82, height 0.25
MURATA-G_M188 [mm]
  rect 0.7x0.8 smd: 1(-0.725,0) 2(0.725,0)
  body extent -0.8,-0.4 0.8,0.4, height 0.9
Net_TIe_254 [mil]
  rect 10x10 smd paste-10 mask-10: 1(0,0) 2(13,0)
  Top Layer region: 9,5 2,5 2,-5 10,-5 10,4
QFN24_CYPD3177-24LQXQT_INF [mil]
  rect 32x10 smd mask+0: 1(-74.5,49.21) 2(-74.5,29.53) 3(-74.5,9.84) 4(-74.5,-9.84) 5(-74.5,-29.53) 6(-74.5,-49.21) 13(74.5,-49.21) 14(74.5,-29.53) 15(74.5,-9.84) 16(74.5,9.84) 17(74.5,29.53) 18(74.5,49.21)
  rect 10x32 smd mask+0: 7(-49.21,-74.5) 8(-29.53,-74.5) 9(-9.84,-74.5) 10(9.84,-74.5) 11(29.53,-74.5) 12(49.21,-74.5) 19(49.21,74.5) 20(29.53,74.5) 21(9.84,74.5) 22(-9.84,74.5) 23(-29.53,74.5) 24(-49.21,74.5)
  rect 104x104 smd mask+0: 25(0,0)
  silkscreen extent -130,-84 84,84, body extent -79,-79 79,79, height 24
RESC0603(1608)_N [mm] "Chip Resistor, Body 1.6x0.8mm, IPC Medium Density"
  rect 0.9x1 smd: 1(-0.8,0) 2(0.8,0)
  silkscreen extent -0.05,-0.4 0.05,0.4, body extent -0.85,-0.47 0.85,0.47, height 0.6
RESC1608X55X30NL15T15 [mm] "Chip Resistor, 2-Leads, Body 1.60x0.80mm, IPC Medium Density"
  rect 0.8x0.95 smd: 1(-0.675,0) 2(0.675,0)
  body extent -0.87,-0.48 0.87,0.48, height 0.55
RESC3216X70X50LL05T20 [mm] "Chip Resistor, 2-Leads, Body 3.20x1.60mm, IPC High Density"
  rect 0.9x1.55 smd: 1(-1.325,0) 2(1.325,0)
  silkscreen extent -0.5,-0.67 0.5,0.67, body extent -1.63,-0.82 1.62,0.82, height 0.7
RGY0024A_V [mm] "QFN, 24-Leads, Body 5.5x3.5mm, Pitch 0.5mm, Thermal Pad 3.1x2.05mm, TI Recommended"
  rrect42% 0.24x0.6 smd: 1(-0.75,2.65) 12(-0.75,-2.65) 13(0.75,-2.65) 24(0.75,2.65)
  rrect42% 0.6x0.24 smd: 2(-1.65,2.25) 3(-1.65,1.75) 4(-1.65,1.25) 5(-1.65,0.75) 6(-1.65,0.25) 7(-1.65,-0.25) 8(-1.65,-0.75) 9(-1.65,-1.25) 10(-1.65,-1.75) 11(-1.65,-2.25) 14(1.65,-2.25) 15(1.65,-1.75) 16(1.65,-1.25) 17(1.65,-0.75) 18(1.65,-0.25) 19(1.65,0.25) 20(1.65,0.75) 21(1.65,1.25) 22(1.65,1.75) 23(1.65,2.25)
  rrect5% 2.05x3.1 smd: 25(0,0)
  silkscreen extent -1.97,-2.98 1.97,2.98, body extent -1.83,-2.83 1.83,2.82, height 1.01
RHB0032E_V [mm] "QFN, 32-Leads, Body 5x5mm, Pitch 0.5mm, Thermal Pad 3.45x3.45mm"
  rrect36% 0.85x0.28 smd: 1(-2.475,1.75) 2(-2.475,1.25) 3(-2.475,0.75) 4(-2.475,0.25) 5(-2.475,-0.25) 6(-2.475,-0.75) 7(-2.475,-1.25) 8(-2.475,-1.75) 17(2.475,-1.75) 18(2.475,-1.25) 19(2.475,-0.75) 20(2.475,-0.25) 21(2.475,0.25) 22(2.475,0.75) 23(2.475,1.25) 24(2.475,1.75)
  rrect36% 0.28x0.85 smd: 9(-1.75,-2.475) 10(-1.25,-2.475) 11(-0.75,-2.475) 12(-0.25,-2.475) 13(0.25,-2.475) 14(0.75,-2.475) 15(1.25,-2.475) 16(1.75,-2.475) 25(1.75,2.475) 26(1.25,2.475) 27(0.75,2.475) 28(0.25,2.475) 29(-0.25,2.475) 30(-0.75,2.475) 31(-1.25,2.475) 32(-1.75,2.475)
  rrect3% 3.45x3.45 smd: 33(0,0)
  silkscreen extent -3.35,-2.58 2.58,2.57, body extent -2.5,-2.5 2.5,2.5, height 1
SDXXC.TCT [mm]
  rect 0.8x0.8 smd mask+0: 1(-1.13,0) 2(1.13,0)
  silkscreen extent -1.03,-0.81 1.03,0.81, body extent -1.36,-0.69 1.36,0.69, height 1.09
SJ-43514-SMT_CUD [mil]
  rect 110x87 smd mask+0: 1(-145.7,281) 3(145.7,96) 4(-145.7,171)
  rect 110x110 smd mask+0: 2(-145.7,-199)
  round 67 / inner round 60 / far side round 67 hole 67 unplated mask+0: M1(0,128) M2(0,-148)
  silkscreen extent -240,-310 123,369
SOLDER_BRIDGE_60MIL [mil]
  round 1 smd mask+0: 1(-16.5,0) 2(16.5,0)
  Top Layer region: 15,0 -5,30 38,30 38,-30 -5,-30
  Top Layer region: -38,-30 -15,-30 5,0 -15,30 -38,30
SOP_DMP3098LSD-13_DIO [mil]
  rect 56x22 smd mask+0: 1(-106,75) 2(-106,25) 3(-106,-25) 4(-106,-75) 5(106,-75) 6(106,-25) 7(106,25) 8(106,75)
  silkscreen extent -175,-102 83,103, body extent -120,-97 120,97, height 69
"Testpoint 1mm"#1 [mm]
  round 1 smd: 1(0,0)
"Testpoint 1mm"#2 [mm]
  round 1 smd paste-2539.97: 1(0,0)
VISHAY-CRCW0603 [mm]
  rect 0.75x1 smd: 1(-0.75,0) 2(0.75,0)
  body extent -1.22,-0.6 1.22,0.6, height 0.25
VISHAY-TNPW0603 [mm]
  rect 0.75x1 smd: 1(-0.75,0) 2(0.75,0)
  body extent -1.1,-0.58 1.1,0.58, height 0.25
WE-SPC_4818 [mm] "SMD Shielded Power Inductor, body 4.8x4.8mm"
  rect 5.3x2 smd: 1(-1270,-1268.25) 2(-1270,-1271.75)
  silkscreen extent -1272.55,-1270.45 -1266.57,-1268.07, body extent -1272.41,-1272.41 -1267.59,-1267.59, height 1.8
WL-TMRC_D5.9H8.7 [mm] "THT Mono-color Round Color LED, 2-leads"
  round 1.5 hole 1: 1(-1.27,0) 2(1.27,0)
  silkscreen extent -3.07,-3.07 2.58,3.08, body extent -2.95,-2.95 2.45,2.95, height 9.2

## Part data
C1 C4 C13 C23 C28 C29 C30 C35 C36 C46: library part CMP-001-02049-3, "10 µF ±10% 25V Ceramic Capacitor X7S 0805 (2012 Metric)", Capacitor Type=Ceramic, Case/Package=0805, Max Operating Temperature=-55°C, Min Operating Temperature=125°C, Temperature Code=X7S, Tolerance=10%, Voltage Rating=25V, Mounting Technology="Surface Mount", Pins=2
C2 C3 C7 C8: library part CMP-1662-00022-2, "Chip Multilayer Ceramic Capacitors for General Purpose, 0603, 1000pF, C0G, 30ppm/°C, 5%, 50V", Case Code (Imperial)=0603, Case Code (Metric)=1608, Dielectric=C0G, Dielectric Material=Ceramic, Insulation Resistance=10GR, Max Operating Temperature=125°C, Min Operating Temperature=-55°C, Package Quantity=1, Temperature Coefficient=30ppm/°C, Tolerance=5%, Voltage=50V, Capacitance=1nF, Case/Package=0603, Depth=0.8mm, Height=0.8mm, Lead Free="Lead Free", Length=1.6mm, Material=Ceramic, Mount="Surface Mount", Number of Pins=2, Packaging="Tape and Reel", Radiation Hardening=No, REACH SVHC="No SVHC", Termination=SMD/SMT, Thickness=0.035inch, Voltage Rating=50V, Voltage Rating (DC)=50V, Width=0.8mm
C5 C6 C10 C11 C15 C17 C19 C20 C31 C33 C39 C40 C41 C47 C48 C49 C50 C51 C55: library part CMP-001-00243-4, "0.1 µF ±10% 50V Ceramic Capacitor X7R 0603 (1608 Metric)", Capacitor Type=Ceramic, Case/Package=0603, Temperature Code=X7R, Tolerance=10%, Voltage Rating=50V, Mounting Technology="Surface Mount", Pins=2, RoHS Compliant=Yes
C9 C21: library part CMP-04424-000592-1, "100uF 6.3V  ±20% 1.7Ω 1210  SMD Tantalum Capacitor", Capacitance=100uF, Case Code (Imperial)=1210, Case Code (Metric)=3528, ESR (Equivalent Series Resistance)=1.7R, Leakage Current=6.3uA, Max Operating Temperature=125°C, Min Operating Temperature=-55°C, Package Quantity=1, Tolerance=20%, Voltage Rating=6.3V, Case/Package=1210, Construction=Flat, Depth=2.8mm, Dissipation Factor=10%, Features="General Purpose", Height=2.1mm, Height - Seated (Max)=0.083inch, Lead Free="Lead Free", Length=3.5mm, Mount="Surface Mount", Number of Pins=2, Packaging="Tape and Reel", Polarity=Polar, Radiation Hardening=No, REACH SVHC="No SVHC", RoHS Compliant=Yes, Series=TAJ, Termination=SMD/SMT, Voltage Rating (DC)=6.3V, Width=2.8mm
C12 C14 C16 C18 C22 C24 C25 C26 C27 C32 C34 C37 C38 C54: library part CMP-001-00230-4, "1 µF ±10% 25V Ceramic Capacitor X7R 0603 (1608 Metric)", Capacitor Type=Ceramic, Case/Package=0603, Temperature Code=X7R, Tolerance=10%, Voltage Rating=25V, Mounting Technology="Surface Mount", Pins=2, RoHS Compliant=Yes
C42 C43: library part CMP-001-00067-3, "10 pF ±0.25pF 50V Ceramic Capacitor C0G, NP0 0603 (1608 Metric)", Capacitor Type=Ceramic, Case/Package=0603, Max Operating Temperature=125°C, Min Operating Temperature=-55°C, Tolerance=2.5%, Voltage Rating=50V, Mounting Technology="Surface Mount", Pins=2, RoHS Compliant=Yes
C44 C45: library part CMP-001-01629-3, Capacitor Type=Ceramic, Case/Package=0603, Temperature Code=C0G, Tolerance=8%, Voltage Rating=100V, Mounting Technology="Surface Mount", Pins=2, RoHS Compliant=Yes
C52 C53: library part CMP-001-00072-7, "2.2 µF ±10% 25V Ceramic Capacitor X5R 0603 (1608 Metric)", Capacitor Type=Ceramic, Case/Package=0603, Max Operating Temperature=85°C, Min Operating Temperature=-55°C, Mounting Technology="Surface Mount", Pins=2, RoHS Compliant=Yes
D1 D2 D3: library part CMP-004-00052-2, "24V Clamp 15A (8/20µs) Ipp Tvs Diode Surface Mount SOD-323", Max Operating Temperature=125°C, Min Operating Temperature=-55°C, Mounting Technology="Surface Mount", Pins=2
D4: library part CMP-1488-00008-3, "WL-TMRC Red Color Diffused 5 mm Round Through Hole LED", Case/Package=Radial, Color=Red, Forward Current=100mA, Forward Voltage=2.1V, Manufacturer Lifecycle Status=ACTIVE, Max Operating Temperature=85°C, Max Reverse Voltage (DC)=5V, Min Operating Temperature=-40°C, Test Current=20mA, Dominant Wavelength=645nm, Height=8.6mm, Length=5mm, Lens Size=5mm, Lens Style="Circular, Diffused, Round", Lifecycle Status=Production, Luminous Intensity=30mcd, Mount="Through Hole", Packaging=Bulk, Peak Wavelength=650nm, REACH SVHC=Unknown, RoHS=Compliant, Viewing Angle=60°, Wavelength=630nm, Width=5mm, YEOL="1 = Estimated lifetime > 10 years"
D5: library part CMP-007-00000-1, "Single Color LED, Hyper Red, Water Clear, 1.6mm", Forward Current=30mA, Forward Voltage=2.5V, Max Operating Temperature=85°C, Min Operating Temperature=-40°C, Mounting Technology="Surface Mount", Pins=2, RoHS Compliant=Yes
J2: "Description", Manufacturer_Name="Same Sky", Copyright="Copyright (C) 2025 Ultra Librarian. All rights reserved.", Manufacturer_Part_Number=SJ-43514-SMT-TR, RefDes=RefDes, Type=Type
J3: library part CMP-002-00084-1, "USB-C (USB TYPE-C) USB 2.0 Receptacle Connector 24 (6+18 Dummy) Position Surface Mount, Right Angle; Through Hole", Case/Package=None, Check_prices=https://www.snapeda.com/parts/10171746-00021LF/Amphenol/view-part/?ref=eda, Component Type=Standard, Design Item ID=10171746-00021LF, MF=Amphenol, MP=10171746-00021LF, Pins=16, SnapEDA_Link=https://www.snapeda.com/parts/10171746-00021LF/Amphenol/view-part/?ref=snap, Source=10171746-00021LF.SchLib
J4: library part CMP-002-00009-3, "Board Connector, 14 Contact(s), 2 Row(s), Male, Straight, 0.05 inch Pitch, Surface Mount Terminal, Locking", Connector Type="BOARD CONNECTOR", Mounting Technology=Board, RoHS Compliant=Yes
L1: library part CMP-1401-00004-3, "WE-SPC SMT Shielded Power Inductor", Ambient Temperature Range High=85°C, Ambient Temperature Range Low=-40°C, Current Rating=1.05A, DC Resistance (DCR)=195mΩ, Inductance=7.8µH, Inductance Tolerance=20%, Max Operating Temperature=125°C, Self Resonant Frequency=35MHz, Core Material=Ferrite, Height=1.8mm, Length=4.8mm, Min Operating Temperature=-40°C, Number of Pins=2, RoHS=Compliant, Width=4.8mm
P1: library part CMP-002-00072-1, "Board Connector, 9 Contact(s), 1 Row(s), Male, Straight, 0.1 inch Pitch, Solder Terminal, Locking, Black Insulator, Plug", Max Operating Temperature=125°C, Min Operating Temperature=-40°C, Connector Type="BOARD CONNECTOR", Mounting Technology=Board, RoHS Compliant=Yes
Q1: library part CMP-2000-05778-1, "P-Channel MOSFET, 30 V, 4 A, -55 to 150 degC, 3-Pin SOT-23-3L, RoHS, Tape and Reel", Continuous Drain Current=4A, Drain-Source On-Volt=30V, Frequency (Max)=NotRequiredMHz, Gate-Source Voltage (Max)=?12V, Manufacturer="Alpha and Omega", Operating Temp Range=-55Cto150C, Operating Temperature Classification=Military, Output Power (Max)=NotRequiredW, Package Description="3-Pin Small Outline Transistor, Body 2.95 x 1.6 mm, Pitch 0.95 mm", Package Reference=SOT-23-3L, Package Type=SOT-23, Power Dissipation=1.4W, Power Gain=NotRequireddB, Channel Mode=Enhancement, Datasheet URL=http://www.aosmd.com/res/data_sheets/AO3401A.pdf, Datasheet Version="Rev. 3, 03/2011", Drain Current (Max)=4A, Drain Efficiency=NotRequired%, Drain-Source On-Res=0.044ohm, Manufacturer URL=http://www.aosmd.com/, Mounting=SurfaceMount, Mounting Technology=SurfaceMount, Noise Figure=NotRequireddB, Number of  Elements=1, Package URL=http://www.aosmd.com/res/packaging_information/SOT-23-3L.pdf, Pin Count=3, Polarity=P, Rad Hardened=No, Type=PowerMOSFET
Q2: library part CMP-013-00013-4, "N-Channel 60 V 115mA (Ta) 370mW (Ta) Surface Mount SOT-23-3", Case/Package=SOT-23, Max Operating Temperature=150°C, Pins=3, RoHS Compliant=Yes
R1 R2 R4 R7 R9 R10 R11 R12 R15 R21 R22 R23 R25 R26 R38 R39 R40: library part CMP-009-00002-7, "10 kOhms ±1% 0.1W, 1/10W Chip Resistor 0603 (1608 Metric) Automotive AEC-Q200 Thick Film", Case/Package=0603, Max Operating Temperature=155°C, Min Operating Temperature=-55°C, Power=100mW, Tolerance=1%, Voltage Rating=75V, Mounting Technology="Surface Mount", Pins=2, RoHS Compliant=No
R3 R5 R6 R8 R17 R18 R29 R31 R32 R33 R34 R37: library part CMP-009-00212-3, "1 kOhms ±0.1% 0.21W Chip Resistor 0603 (1608 Metric) Anti-Sulfur, Automotive AEC-Q200, Moisture Resistant Thin Film", Case/Package=0603, Max Operating Temperature=125°C, Min Operating Temperature=-55°C, Power=100mW, Tolerance=0.1%, Voltage Rating=100V, Mounting Technology="Surface Mount", Pins=2, RoHS Compliant=Yes
R13 R19: library part CMP-2003-00793-1, Manufacturer=Panasonic, Part Number=ERJ8CWFR020V
R14 R30: library part CMP-1012-00676-1, "30K1 0.1W 1% 0603 (1608 Metric)  SMD", Case-EIA=0603, Case-Metric=1608, Power="0.1 W", Tolerance="1 %", Technology=SMT
R16: library part CMP-009-00281-1, "RES SMD 10 OHM 1% 3/4W 1206", Case/Package=1206, Max Operating Temperature=155°C, Min Operating Temperature=-55°C, Power=750mW, Tolerance=1%, Voltage Rating=200V, Mounting Technology="Surface Mount", Pins=2
R20 R35: library part CMP-009-00003-6, "4.7 kOhms ±1% 0.1W, 1/10W Chip Resistor 0603 (1608 Metric) Automotive AEC-Q200 Thick Film", Case/Package=0603, Max Operating Temperature=155°C, Min Operating Temperature=-55°C, Power=100mW, Tolerance=1%, Voltage Rating=75V, Mounting Technology="Surface Mount", Pins=2, RoHS Compliant=No
R24: library part CMP-2000-00550-1, Manufacturer=Panasonic, Part Number=ERJ-3EKF5231V
R27: library part CMP-2000-05824-2, "Thermistor NTC 10KOhm 1% 2-Pin", Max Operating Temperature=110°C, Min Operating Temperature=-50°C, Resistance=10kR, Tolerance=1%, Height=2.4mm, Lead Pitch=2.54mm, Length=17mm, Number of Pins=2, Packaging=Bulk, RoHS Compliant=Yes, Series=AT, Termination=Radial, Width=3.7mm
R28 R36: library part CMP-009-00147-4, "2.2 kOhms ±1% 0.1W, 1/10W Chip Resistor 0603 (1608 Metric) Automotive AEC-Q200 Thick Film", Case/Package=0603, Max Operating Temperature=155°C, Min Operating Temperature=-55°C, Power=100mW, Tolerance=1%, Voltage Rating=75V, Mounting Technology="Surface Mount", Pins=2, RoHS Compliant=No
SB1 SB2: library part CMP-00030-00002-6, "Various 2-pad solder bridge footprints", Pins=2
TP1 TP2 TP3 TP4 TP5 TP6 TP7 TP8 TP9 TP10 TP11 TP12 TP13 TP14 TP15 TP16 TP17 TP18 TP19 TP20 TP21 TP22 TP23 TP24 TP25 TP26 TP27: library part CMP-00030-00004-4, "Labelled 1mm testpoint pad"
U1: "EZ-PDâ„¢ Barrel Connector Replacement (BCR) CYPD3177-24LQXQT is the tape and reel packing type option of EZ-PDâ„¢ BCR family, the highly-integrated USB Type-C port controllers for power sink applications. It targets electronic devices using legacy barrel connectors up to 100 W or USB micro-B for power inputs, enabling product designers to replace these incompatible connectors with USB-C.EZ-PDâ„¢ BCR complies with USB Type-C and USB 3.0 Power Delivery (PD) standards and enables users to quickly convert their devices from being powered through a barrel connector to being powered via the USB-C connector with few external components and no firmware development is required. It integrates a complete USB Type-C transceiver, USB PD policy manager, a load switch controller with a soft start, all termination resistors required for a USB Type-C port, and system-level ESD protection. It is available in a 24-pin QFN package.", Manufacturer_Name=Infineon, Copyright="Copyright (C) 2026 Ultra Librarian. All rights reserved.", Manufacturer_Part_Number=CYPD3177-24LQXQT, RefDes=RefDes, Type=Type
U2: library part CMP-0321-00108-2, "Synchronous Switch-Mode Li-Ion and Li-Polymer Stand-Alone Battery Charger, -40 to 85 degC, 24-pin VQFN (RGY), Green (RoHS & no Sb/Br)", Manufacturer="Texas Instruments", Over Voltage Protection=N, Code_JEDEC=MO-241-BA, ComponentLink1Description=Datasheet, ComponentLink1URL=http://www.ti.com/general/docs/lit/getliterature.tsp?genericPartNumber=BQ24133&fileType=pdf, DatasheetVersion=SLUSAF7B, Eco-Plan="Green (RoHS & no Sb/Br)", Lead Acid=N, Li-Ion=N, Li-Polymer=N, Mounting Technology="Surface Mount", NiCd=N, NiMH=N, PackageDescription="24-Leads Plastic Quad Flatpack No-Lead, 5.5 x 3.5 x 0.9 mm Body, 0.5 mm Pitch, Exposed Pad", PackageReference=RGY0024A, PackageVersion="revI, Jun-2011", PartNumber=BQ24133RGYT, SubFamily="Battery Charge Management"
U3: library part CMP-04917-000056-1, "IC REG LIN 3.3V 800MA SOT223-4", Dropout Voltage=1.2V, Manufacturer="Texas Instruments", Max Junction Temp=+125°C, Max Supply Voltage=15V, Min Supply Voltage=4.7V, Nominal Supply Current=5mA, Output Current=0.8A, Output Voltage=3.3V, Package=DCY0004A, Temperature="-40°C to +125°C", Temperature Range Low=-40°C, Automotive=No, Category=IC, ComponentLink2Description=Datasheet, ComponentLink2URL=http://www.ti.com/lit/ds/symlink/tlv1117.pdf, Device Class L1="Integrated Circuits (ICs)", Device Class L2="Power Management ICs", Device Class L3="Voltage Regulators - Linear", Digikey Description="IC REG LIN 3.3V 800MA SOT223-4", Height=1.8mm, Lead Free=Yes, Manufacturer Part Number=TLV1117-33IDCYR, Mouser Description="LDO Voltage Regulators Fixed LDO Volt Reg", Number Of Outputs=1, Octopart=https://octopart.com/tlv1117-33idcyr-texas+instruments-669250, Output Type=Fixed, RoHS=TRUE, Standoff Height=0.02mm, Temperature Range High=+125°C
U4: library part CMP-0331-00065-2, "Low-Power Stereo CODEC with 6 Inputs, 6 Outputs, HP Amp and Enhanced Digital Effects, 2 ADCs and 2 DACs, 102 dB DAC SNR, -40 to 85 degC, 32-pin QFN (RHB), Green (RoHS & no Sb/Br)", Battery Powered=TRUE, Manufacturer="Texas Instruments", # ADCs (typ)=2, # DACs=2, Additional Features="LP Bypass, Notch Filtering, 3D, EQ, Matrix Mixing, PLL", Code_JEDEC=MO-220, ComponentLink1Description=Datasheet, ComponentLink1URL=http://www.ti.com/general/docs/lit/getliterature.tsp?genericPartNumber=TLV320AIC3104&fileType=pdf, Control Interface=I2C, DAC SNR=102, DatasheetVersion=SLAS510C, Digital Audio Interfaces="L, R, I2S, DSP, TDM", Mounting Technology="Surface Mount", PackageDescription="32-Pin Plastic Quad Flat No-Lead, 5 x 5 mm Body, 0.5 mm Pitch, 3.45 x 3.45 mm Exposed Pad", PackageReference=RHB0032E, PackageVersion="revD, Jun-2011", PartNumber=TLV320AIC3104IRHBT, Sampling Rate (Max) (kHz)=96
U5 U6: library part CMP-04894-000047-1, "IC AUDIO 2 CIRCUIT 8SON", Input Bias Current=10pA, Input Offset Voltage (Vos)=500uV, Max Operating Temperature=85°C, Min Operating Temperature=-40°C, Operating Supply Current=2mA, Gain Bandwidth Product=16MHz, Mount="Surface Mount", Number of Channels=2, Number of Circuits=2, Packaging="Cut Tape", RoHS Compliant=Yes, Slew Rate=9V/µs
U7: library part CMP-0243-00156-2, "IC MCU 32BIT 1MB FLASH 64LQFP", Case/Package=LQFP, Frequency=168MHz, Max Operating Temperature=85°C, Max Power Dissipation=435mW, Max Supply Voltage=3.6V, Min Operating Temperature=-40°C, Min Supply Voltage=1.8V, Package Quantity=1000, Contact Plating=Tin, Core Architecture=ARM, Data Bus Width=32b, Height=1.45mm, Interface=I2C, Lead Free="Lead Free", Length=10mm, Max Frequency=168MHz, Memory Size=1024KB, Memory Type=FLASH, Mount="Surface Mount", Number of ADC Channels=16, Number of I2C Channels=3, Number of I/Os=51, Number of Pins=64, Number of Programmable I/O=51, Number of SPI Channels=3, Number of Timers/Counters=14, Number of UART Channels=2, Number of USB Channels=2, Oscillator Type=Internal, Packaging="Tape and Reel", Peripherals="Brown-out Detect/Reset", Radiation Hardening=No, RAM Size=196KB, Watchdog Timer=Yes, Width=10mm
U8: "Description", Manufacturer_Name="Diodes Inc", Copyright="Copyright (C) 2025 Ultra Librarian. All rights reserved.", Manufacturer_Part_Number=DMP3098LSD-13, RefDes=RefDes, Type=Type
X1: library part CMP-003-00007-1, "25 MHz ±10ppm Crystal 10pF 50 Ohms, Automotive AEC-Q200, 4-SMD, No Lead", Frequency=25MHz, Load Capacitance=10pF, Max Operating Temperature=85°C, Min Operating Temperature=-40°C, ESR=50, Mounting Technology="Surface Mount", Pins=4, RoHS Compliant=Yes
Y1: library part CMP-003-00006-2, "32.768 kHz ±10ppm Crystal 7pF 70 kOhms, Automotive AEC-Q200, 2-SMD, No Lead", Frequency=32.768kHz, Load Capacitance=7pF, Max Operating Temperature=125°C, Min Operating Temperature=-40°C, ESR=70k, Mounting Technology="Surface Mount", Pins=2, RoHS Compliant=Yes

## Via types
v1: diameter 0.45, hole 0.3, Top Layer to Bottom Layer, tented both sides, 416 vias
v2: diameter 1, hole 0.5, Top Layer to Bottom Layer, tented both sides, 224 vias
v3: diameter 0.5, hole 0.2, Top Layer to Bottom Layer, 13 vias

## Nets (pads, with @x,y where several pads share a name; then routed paths per layer and width w, separated by ;. In a path a pad name is that pad's centre, name@x,y a point inside that pad or via, vN(x,y) a via of type N, cw(c..) or ccw(c..) an arc to the next point about the centre after c; other vN are vias at no path point)
3V3+: C28.1 C29.1 C46.1 C47.1 C48.1 C49.1 C50.1 C51.1 C54.1 C55.1 D5.2 J4.3 P1.1 R11.2 R20.1 R38.2 R39.2 U3.2 U3.4 U4.25 U7.1 U7.13 U7.19 U7.32 U7.48 U7.64 | length 41.3
  Top Layer w0.18: R20.1@30.326,17.884 v1(31.401,17.884) ; J4.3@43.443,4.827 v1(43.443,5.902) ; R38.2@59.14,6.476 v1(60.078,5.538) ; R39.2@60.918,6.476 v1(61.856,5.538) ; U7.64@65.079,9.987 65.079,9.251 65.97,8.36 66.02,8.36 66.28,8.1 C50.1@66.28,8.05 v1(67.229,8.049) ; U7.13@66.92,17.828 67.877,17.828 68.547,18.498 68.547,18.548 68.807,18.808 C51.1@68.857,18.808 v1(69.932,18.808) ; R11.2@139.127,16.197 139.357,15.974 v1(139.95,15.4)
  Top Layer w0.254: D5.2@34.275,24.204 v1(34.275,26.1) ; C46.1@54.809,23.313 56.953,21.17 U7.32@57.579,21.17 ; C49.1@55.725,8.1 55.732,8.107 56.307,8.107 v1(56.7,8.5) ; U7.48@55.737,11.828 55.737,11.188 v1(55.75,11.175) ; U7.19@64.079,21.17 64.079,22.929 64.723,23.573 64.723,23.604 64.871,23.752 66.123,23.752 66.502,23.373 66.552,23.373 66.775,23.15 C47.1@66.775,23.1 66.775,23.05 66.998,22.827 67.048,22.827 67.362,22.513 67.362,22.288 v1(67.4,22.25) ; U7.1@66.92,11.828 67.366,11.828 67.387,11.808 67.387,11.549 67.543,11.393 C48.1@68.58,11.393 ; U4.25@91.308,54.975 91.308,55.245 91.321,55.258 91.591,55.258 92.025,55.692 C55.1@92.025,56.9 C54.1@92.025,58.5
  Top Layer w0.7: U3.4@91.201,70.333 94.433,70.333 96,71.9 96,72.2 C28.1@96.3,72.2 ; U3.2@91.201,76.133 91.201,78.301 91.5,78.6 C29.1@91.5,78.9
  other v1: 65.37,8.96 67.762,11.393 68.212,18.163 55.881,22.241 92.025,55.95 88.8,65.5 89.8,65.5 90.8,65.5 91.8,65.5 92.8,65.5 93.8,65.5 88.8,66.5 89.8,66.5 90.8,66.5 91.8,66.5 92.8,66.5 93.8,66.5 88.8,67.5 89.8,67.5 92.8,67.5 93.8,67.5 88.8,68.5 89.8,68.5 92.8,68.5 93.8,68.5 93.912,70.333 94.651,70.551 95.125,71.025 95.597,71.497 91.201,77.758
ACN: NT1.1 NT2.2 U2.5 | length 2.7
  Top Layer w0.12: NT2.2@18.47,62.375 18.26,62.165 ccw(c18.345,62.08) 18.225,62.08 18.225,61.825 ccw(c18.345,61.825) 18.26,61.74 19.122,60.878 U2.5@19.625,60.878
  Top Layer w0.254: NT1.1@18.419,62.618 18.419,62.425 NT2.2@18.47,62.375
ACSET: R22.1 R28.2 TP17.1 U2.17 | length 16.2
  Top Layer w0.12: U2.17@22.925,59.378 23.405,59.378 23.885,58.898 ; 23.885,58.897 24.13,58.652 24.13,58.49 24.2,58.42 25.257,58.42 R22.1@25.339,58.338 ; R28.2@26.99,58.338 27.886,58.338 27.956,58.408 27.956,58.79 28.094,58.928 37.084,58.928 TP17.1@37.846,58.166
  Top Layer w0.254: R22.1@25.339,58.338 R28.2@26.99,58.338
Analog_Audio_Signal: C4.1 J1.1 | length 4.6
  Top Layer w0.187: C4.1@144.526,19.692 149.092,19.692 J1.1@149.1,19.7
Analog_SE_In: C5.2 TP6.1 U4.16 | length 62.6
  Top Layer w0.254: v1(91.205,44.18) 91.308,44.283 U4.16@91.308,50.025 ; C5.2@134.366,20.221 134.366,18.934 v1(134.4,18.9)
  Bottom Layer w0.254: v1(91.205,44.18) 93.22,44.18 95,42.4 95,39.4 115.5,18.9 v1(134.4,18.9)
Analog_SE_Right_Out: C6.2 J5.1 | length 3.8
  Top Layer w0.254: C6.2@145.378,46.903 148.749,46.903 J5.1@149.122,47
BOOT0: R40.1 U7.60 | length 2.1
  Top Layer w0.18: R40.1@62.761,8.038 62.794,8.038 63.079,8.323 U7.60@63.079,9.987
CC1: J3.A5 U1.15 | length 35.7
  Top Layer w0.18: J3.A5@5.972,34.651 6.918,34.651 6.967,34.7 11.925,34.7 cw(c11.925,34.52) 12.053,34.647 v1(16.7,30) ; U1.15@29.436,21.317 29.716,21.317 29.799,21.4 v1(30.6,21.4)
  Bottom Layer w0.18: v1(16.7,30) 16.7,29.96 17.247,29.412 cw(c17.12,29.285) 17.3,29.285 17.3,21.98 ccw(c17.48,21.98) 17.48,21.8 30.125,21.8 cw(c30.125,21.62) 30.252,21.748 v1(30.6,21.4)
CC2: J3.B5 U1.14 | length 33.2
  Top Layer w0.18: J3.B5@5.972,31.651 9.545,31.651 9.545,31.629 9.671,31.503 10.097,31.503 v1(12.5,29.1) ; U1.14@29.436,20.817 29.453,20.8 v1(30.6,20.8)
  Bottom Layer w0.18: v1(12.5,29.1) 16.4,25.2 16.4,20.68 ccw(c16.58,20.68) 16.58,20.5 30.225,20.5 ccw(c30.225,20.68) 30.352,20.552 v1(30.6,20.8)
D_N: D2.2 J3.A7 J3.B6 U7.45 | length 68.3
  Top Layer w0.2: J3.B6@5.972,32.651 J3.A7@5.972,33.151 6.015,33.108 8.7,33.108 9.554,32.254 D2.2@10.308,32.254 ; D2.2@10.46,32.272 11.587,32.272 cw(c11.587,32.072) 11.729,32.213 11.873,32.069 13.462,30.48 13.462,16.002 17.416,12.048 37.889,12.048 39.718,13.876 54.035,13.876 54.578,13.333 55.236,13.333 55.238,13.331 55.735,13.331 U7.45@55.737,13.328
D_P: D1.2 J3.A6 J3.B7 U7.44 | length 69.2
  Top Layer w0.2: J3.B7@5.972,34.151 J3.A6@5.972,33.651 6.022,33.601 6.563,33.601 6.564,33.6 8.744,33.6 9.113,33.97 D1.2@10.298,33.97 11.43,33.97 12,33.4 12,32.637 13.954,30.684 13.954,16.206 17.62,12.54 37.686,12.54 39.514,14.368 54.238,14.368 54.782,13.824 55.236,13.824 55.238,13.826 55.735,13.826 U7.44@55.737,13.828
Diff_Right_In+: TP1.1 U4.12 | length 7.1
  Top Layer w0.254: TP1.1@86.4,44.1 86.4,46.6 89.3,49.5 89.3,50.017 U4.12@89.308,50.025
Diff_Right_In-: TP2.1 U4.13 | length 6.6
  Top Layer w0.254: TP2.1@88,44.2 88,47.1 89.8,48.9 89.8,50.017 U4.13@89.808,50.025
DRVDD_1: C11.1 C12.1 C13.1 TP9.1 U4.18 | length 9.9
  Top Layer w0.254: U4.18@92.033,51.25 92.045,51.238 92.587,51.238 92.702,51.123 93.098,51.123 93.23,51.255 C12.1@93.889,51.255 ; C11.1@93.926,52.816 93.889,52.779 C12.1@93.889,51.255 ; TP9.1@100.076,50.8 96.272,50.8 96.123,50.949 96.123,50.977 95.9,51.2 C13.1@95.6,51.2 95.077,51.255 C12.1@93.889,51.255
DRVDD_2: C14.1 C15.1 U4.24 | length 4
  Top Layer w0.254: U4.24@92.033,54.25 92.046,54.263 92.463,54.263 92.9,54.7 93.575,54.7 93.727,54.548 93.727,54.498 93.95,54.275 C15.1@94,54.275 94.273,54.232 C14.1@95.227,54.232 ; C14.1@95.228,54.232 cw(c95.266,53.981) 95.266,54.235 95.327,54.235 C14.1@95.6,54.275
DVDD: C18.1 C19.1 U4.32 | length 4.3
  Top Layer w0.254: C18.1@85.925,58 85.925,56.293 85.954,56.264 85.971,56.247 86.536,56.247 87.525,55.258 87.795,55.258 87.808,55.245 U4.32@87.808,54.975